# Altium PCB MAX96717_EVB_revC.PcbDoc (part 1 of 2)
Units mm, origin at the board's own origin, x right, y up, seen from the top; angles counter-clockwise.
Board outline 60 x 50 mm, 4 copper layers (Top Layer, Mid Layer 1, Mid Layer 2, Bottom Layer), stack 1.586 mm thick; 104 components, 57 nets, 332 pads, 116 vias.
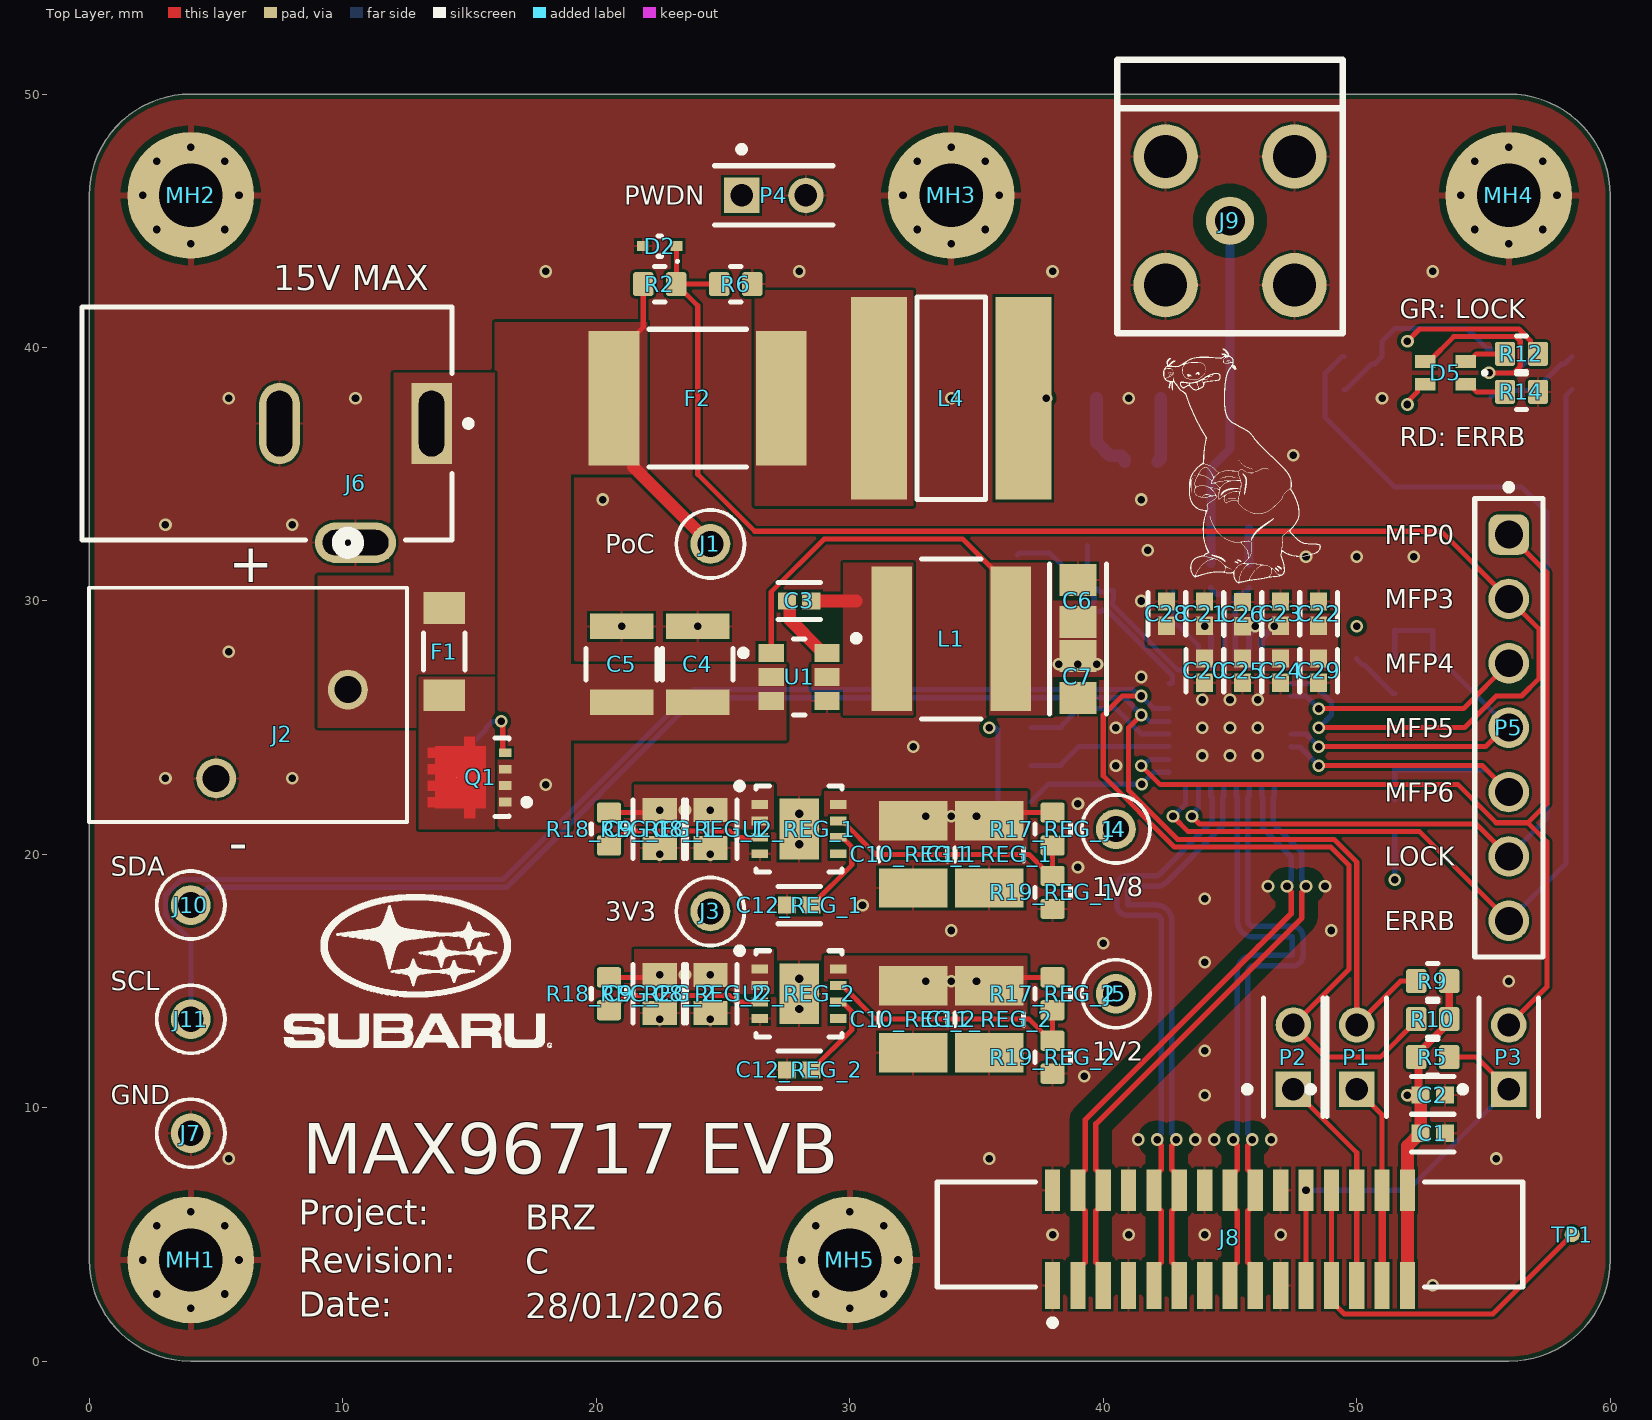
[diagram p0: Top Layer view]
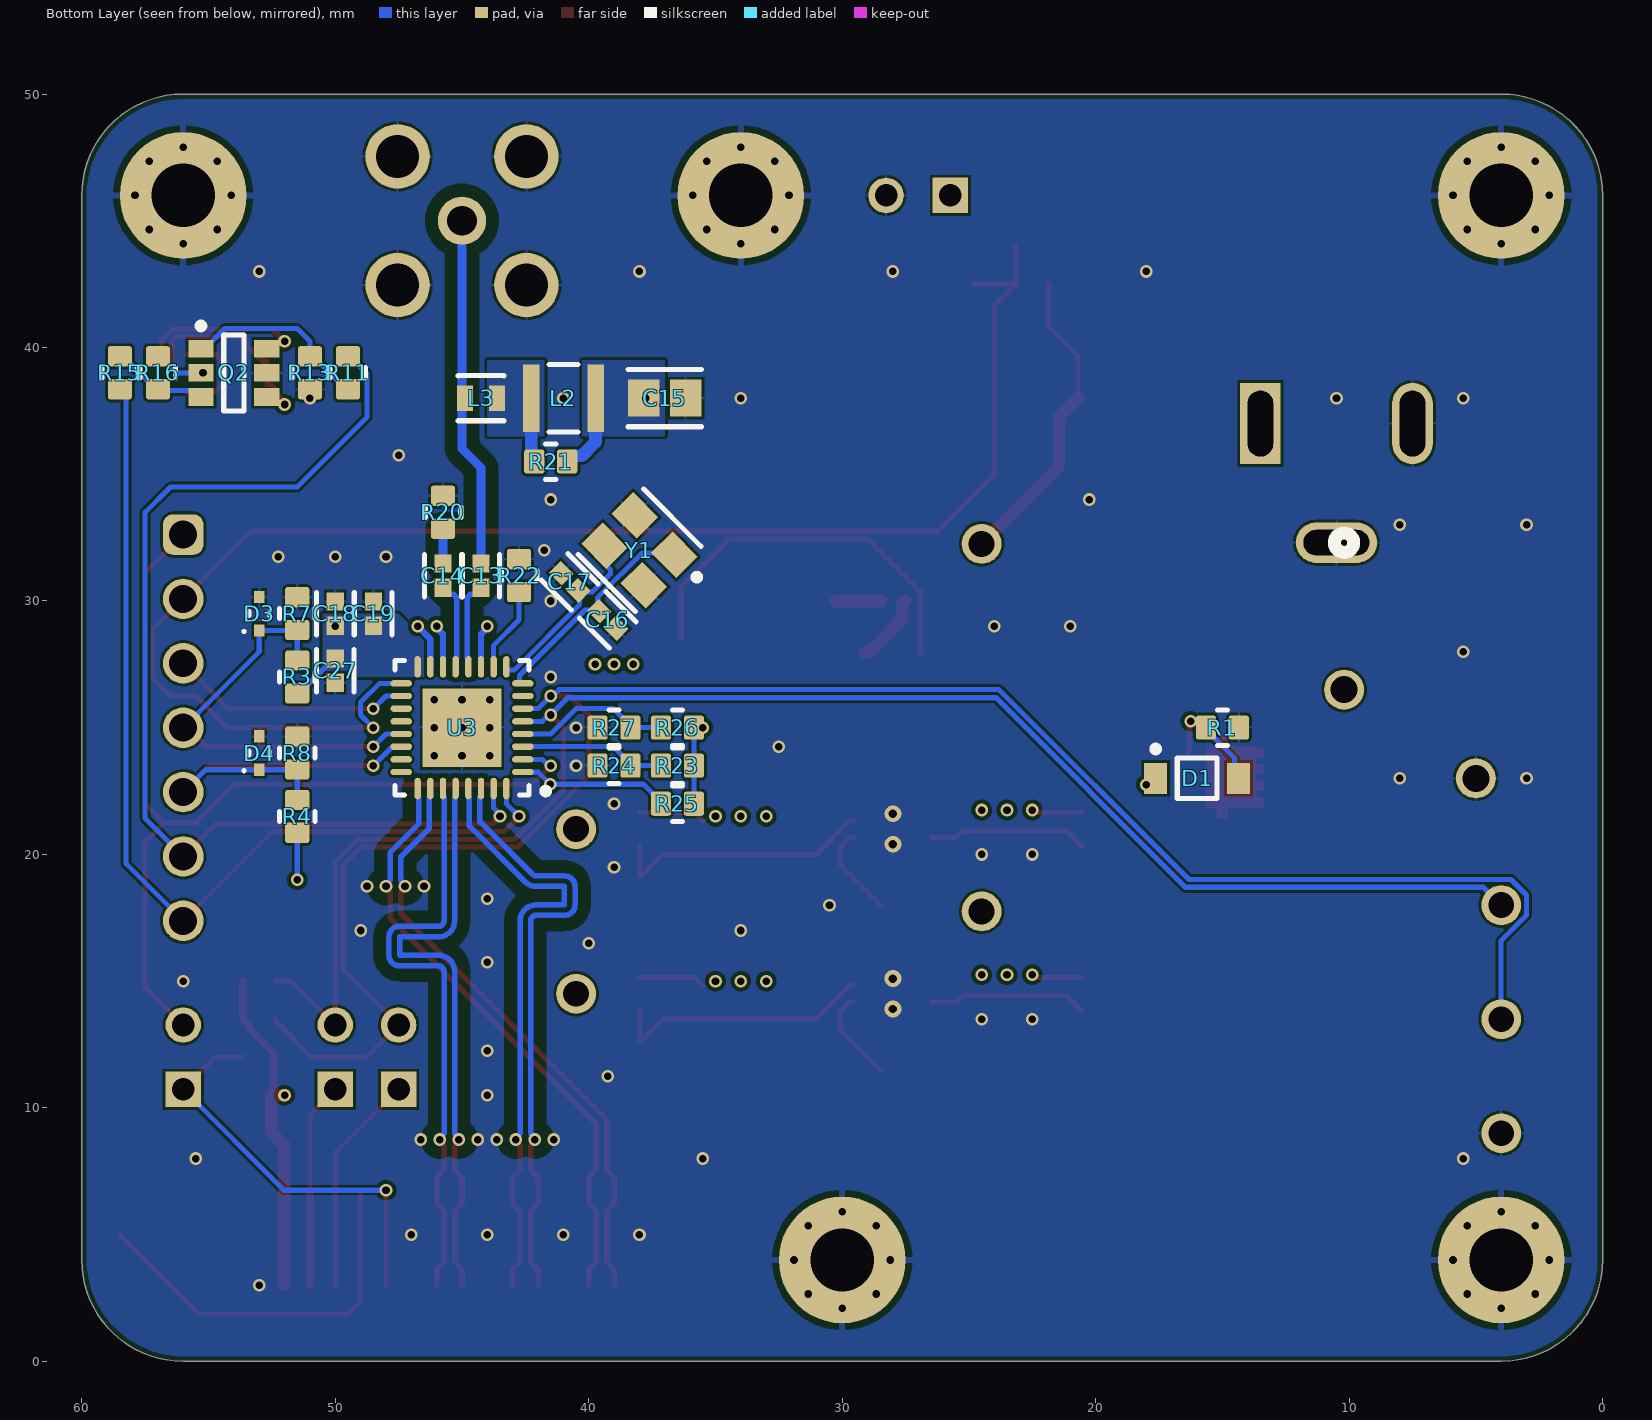
[diagram p1: Bottom Layer view, seen from below]
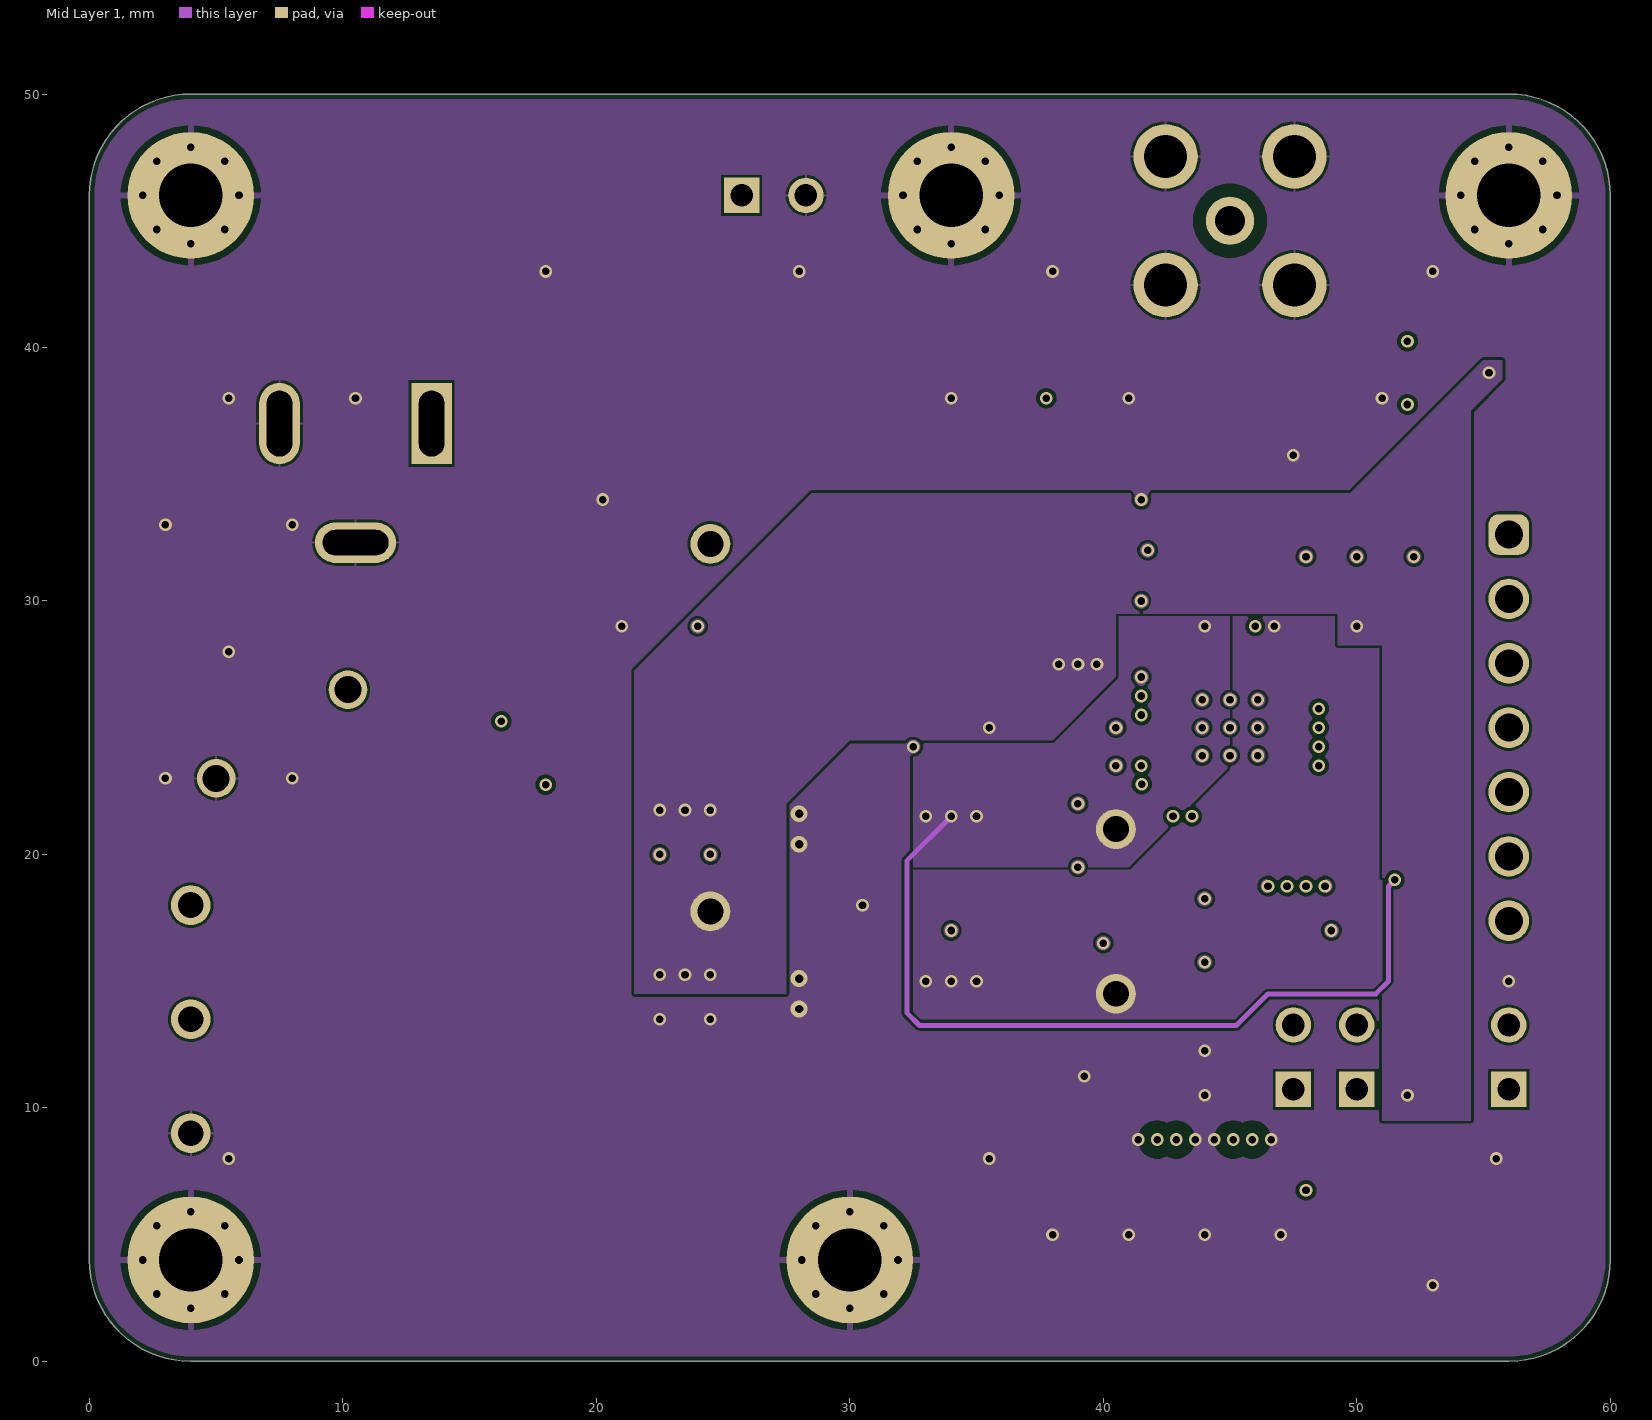
[diagram p2: Mid Layer 1]
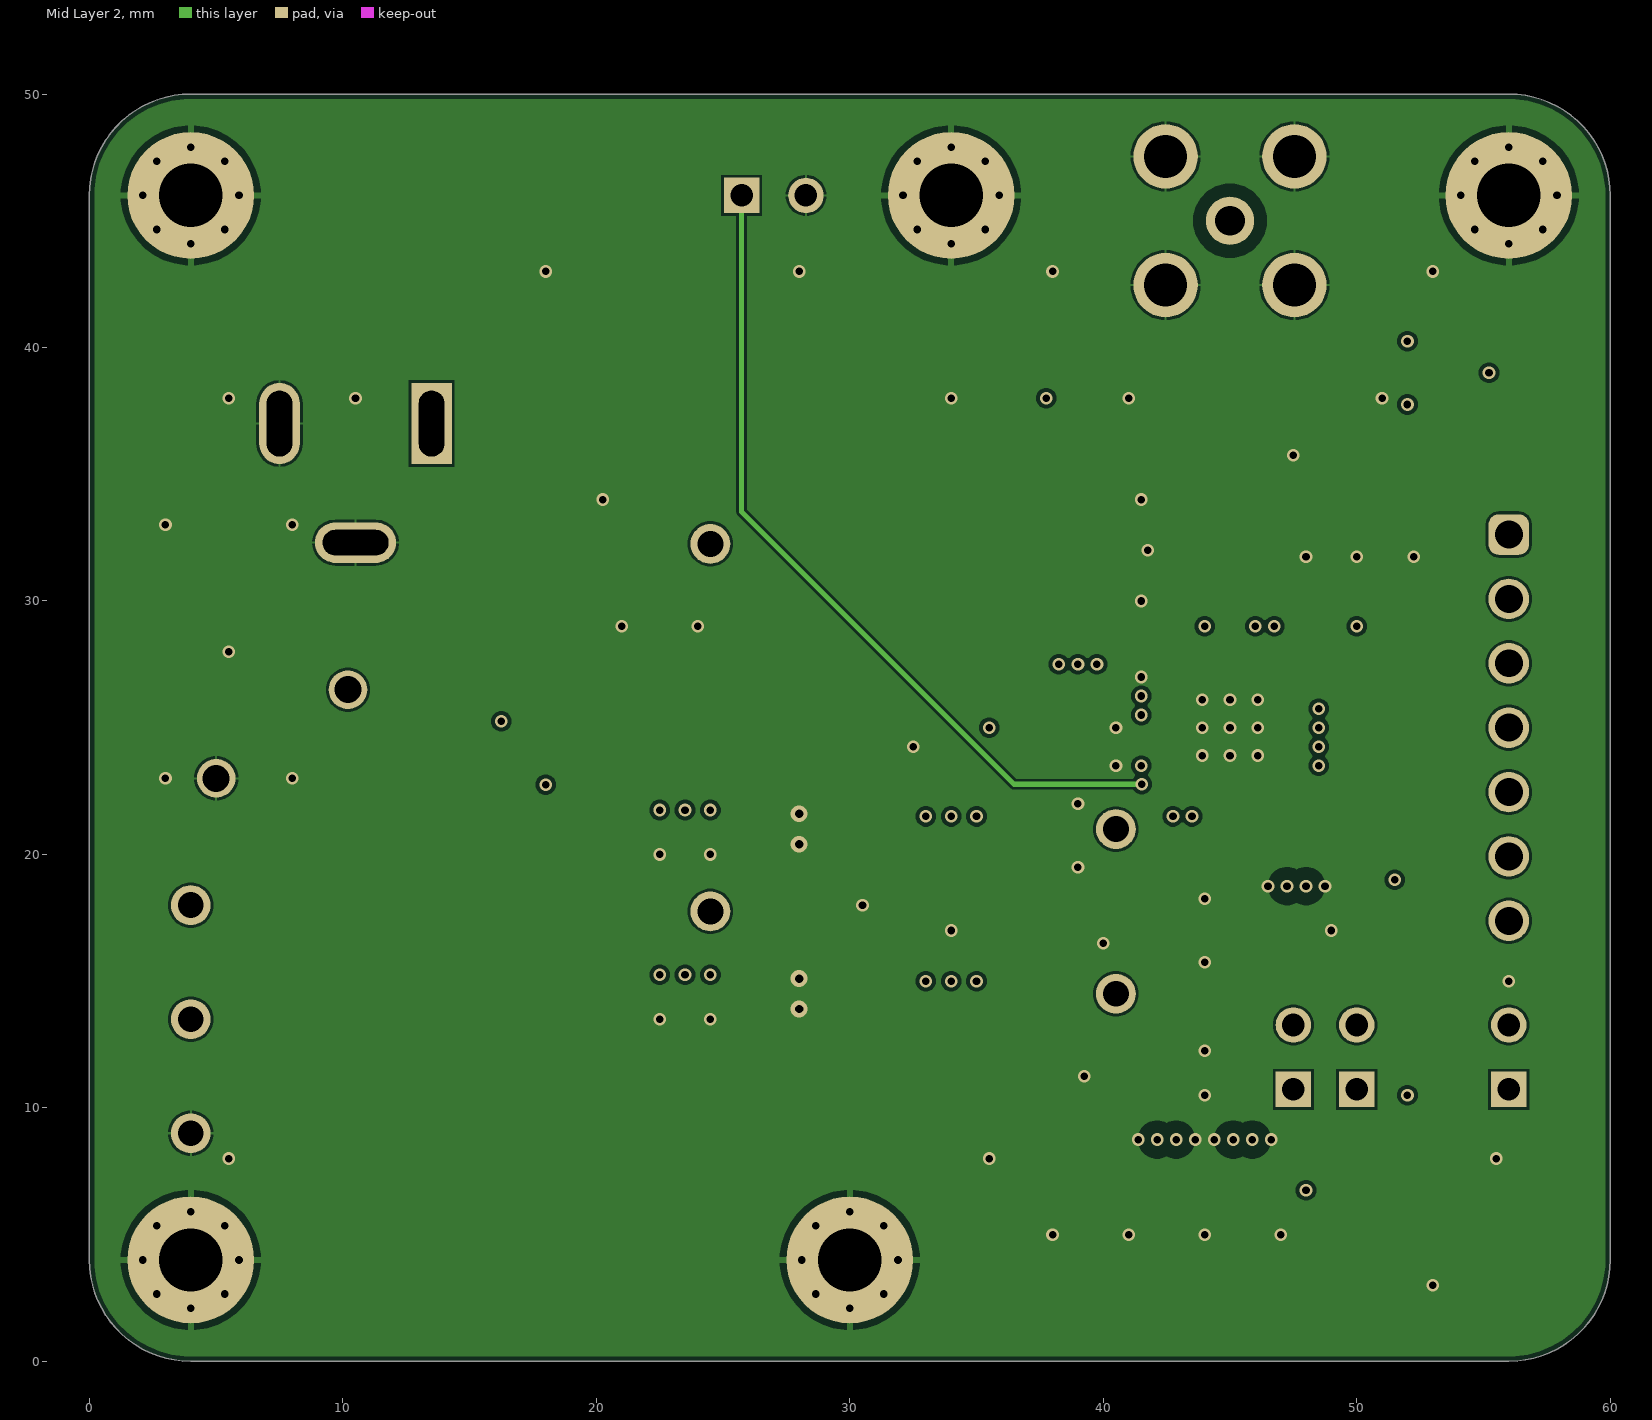
[diagram p3: Mid Layer 2]
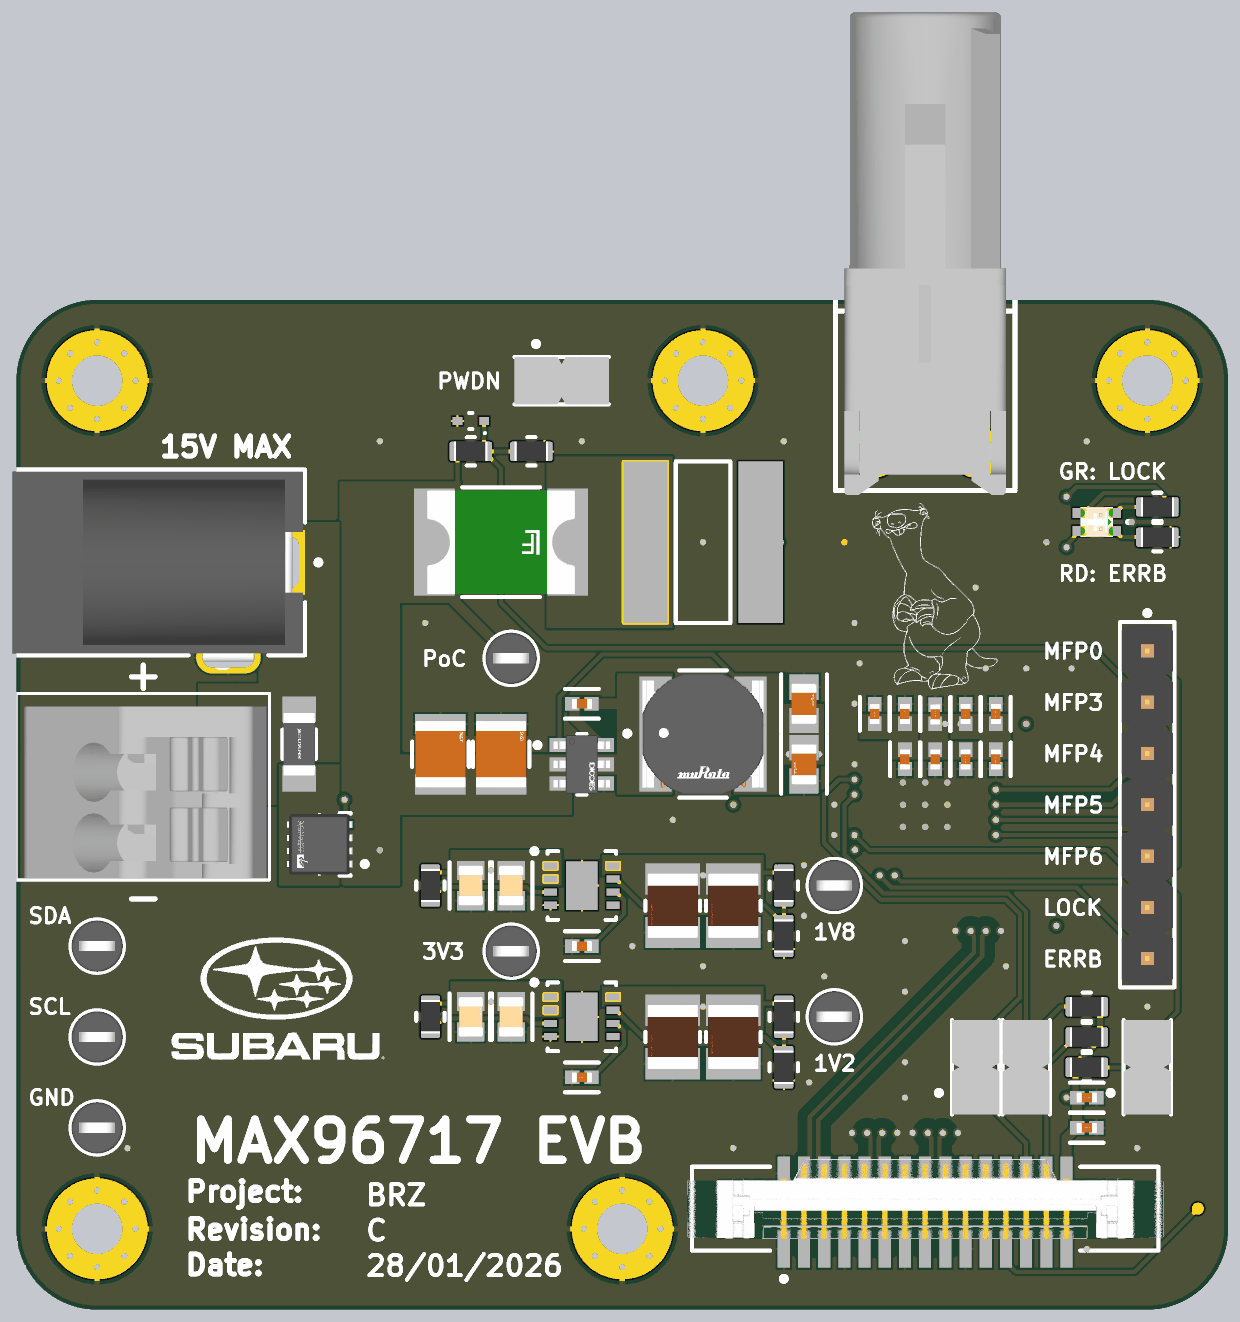
[diagram p4: 3D render of the assembled board from above, using the file's embedded part models]
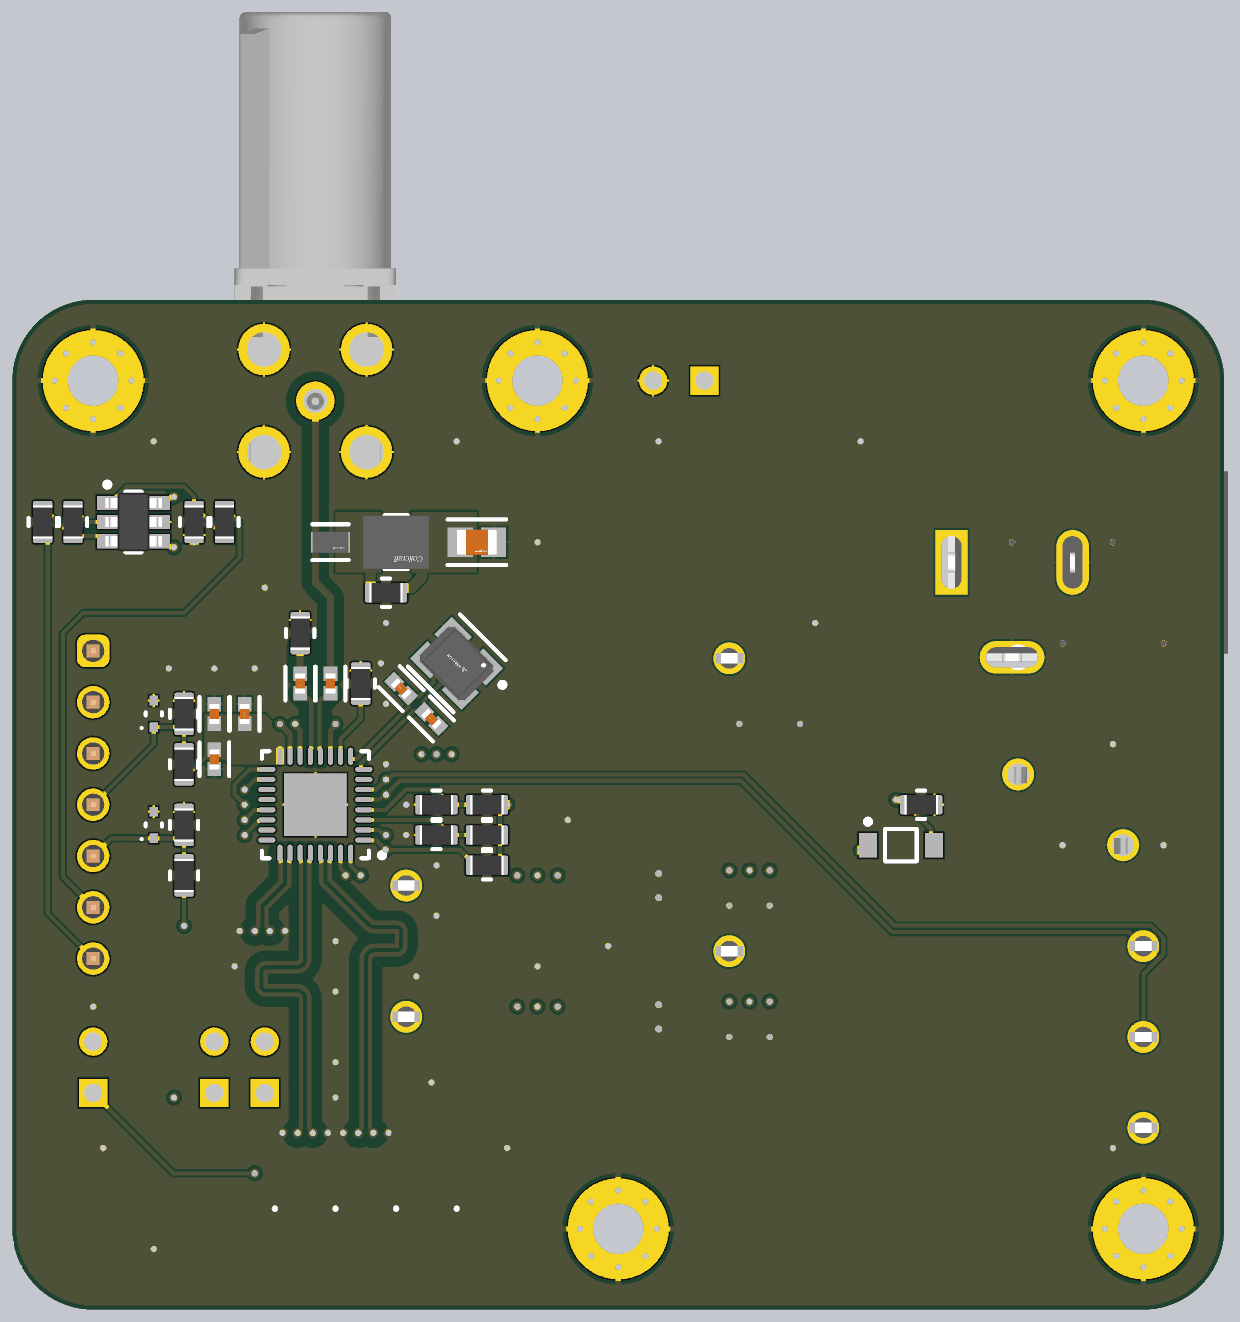
[diagram p5: 3D render of the assembled board from below, using the file's embedded part models]

## Layer stack, top to bottom
Top Solder: solder mask 0.0127, Solder Resist, Dk 3.8
Top Layer: signal copper 0.035
Dielectric 1: prepreg 0.2104, 7628, Dk 4.6
Mid Layer 1: signal copper 0.0152
Core: core 1.065, FR-4, Dk 4.5
Mid Layer 2: signal copper 0.0152
Dielectric 2: prepreg 0.2104, 7628, Dk 4.6
Bottom Layer: signal copper 0.035
Bottom Solder: solder mask 0.0127, Solder Resist, Dk 3.8

## Board outline
0,4 ccw(c4,4) 4,0 56,0 ccw(c56,4) 60,4 60,6 60,46 ccw(c56,46) 56,50 4,50 ccw(c4,46) 0,46

## Design rules (kind name [scope] priority, off if disabled: settings)
BoardOutlineClearance [All] p1: gap=0.2 ignorepadtopadclearanceinfootprint=FALSE
Clearance "IMPEDANCE CLEARANCE" [InNetClass('50SINGLE') or InDifferentialPairClass('100DIFF') or InDifferentialPairClass('CSI') vs InNet('GND')] p1: gap=0.102 ignorepadtopadclearanceinfootprint=FALSE except(0.5: Arc-Poly Track-Poly THPad-Poly Via-Poly Fill-Poly Poly-Poly)
Clearance [All] p2: gap=0.102 ignorepadtopadclearanceinfootprint=FALSE except(0.127: Arc-Via Track-Via SMDPad-Via THPad-Via Via-Via Via-Fill Via-Poly Via-Region Via-Text; 0.25: Arc-Hole Track-Hole SMDPad-Hole THPad-Hole Via-Hole Fill-Hole Poly-Hole Region-Hole Text-Hole)
ComponentClearance [All] p1: gap=0.102 collisioncheckmode=3 verticalgap=0.102 showdistances=TRUE
DiffPairsRouting 100OHM [InDifferentialPairClass('100DIFF') or InDifferentialPairClass('CSI')] p1: maxlimit=0.2 minlimit=0.127 mostfreqgap=0.2 toplayer_mingap=0.2 toplayer_minwidth=0.217 toplayer_maxwidth=0.217 toplayer_prefwidth=0.217 midlayer1_maxgap=0.127 midlayer1_prefgap=0.127 midlayer1_minwidth=0.09 midlayer1_maxwidth=0.09 midlayer1_prefwidth=0.09 midlayer2_maxgap=0.127 midlayer2_prefgap=0.127 midlayer2_minwidth=0.09 midlayer2_maxwidth=0.09 midlayer2_prefwidth=0.09 bottomlayer_mingap=0.2 bottomlayer_minwidth=0.217 bottomlayer_maxwidth=0.217 bottomlayer_prefwidth=0.217 impedanceprofiledriven=TRUE impedanceprofileid={CC6442F0-45BD-4488-A742-C23EBCDFA98F} impedanceprofilevalue=100.000000 maxuncoupledlength=12.7
DiffPairsRouting [All] p2: maxlimit=0.102 minlimit=0.102 mostfreqgap=0.102 toplayer_minwidth=0.102 toplayer_maxwidth=1816.048 toplayer_prefwidth=0.2 midlayer1_minwidth=0.102 midlayer1_maxwidth=1816.048 midlayer1_prefwidth=0.2 midlayer2_minwidth=0.102 midlayer2_maxwidth=1816.048 midlayer2_prefwidth=0.2 bottomlayer_minwidth=0.102 bottomlayer_maxwidth=1816.048 bottomlayer_prefwidth=0.2 maxuncoupledlength=12.7
Height [All] p1: minheight=0 maxheight=1816.048 prefheight=12.7
HoleSize [All] p1: absolutevalues=TRUE maxlimit=6.3 minlimit=0.2 maxpercent=80.000 minpercent=20.000
HoleToHoleClearance [All] p1: gap=0.25 allowstackedmicrovias=FALSE
MatchedLengths CSI_INTRA_PAIR [InDifferentialPairClass('CSI')] p1: tolerance=0.1 checknetsindiffpair=TRUE checkdiffpairvsdiffpair=FALSE checkxsignals=FALSE checkothers=FALSE
MatchedLengths CSI_INTER_PAIR [InDifferentialPairClass('CSI')] p2: tolerance=0.1 checknetsindiffpair=FALSE checkdiffpairvsdiffpair=TRUE checkxsignals=TRUE checkothers=TRUE
MinimumAnnularRing [All] p1: minimumring=0.076
MinimumSolderMaskSliver [All] p1: minsoldermaskwidth=0
PlaneClearance [All] p1: clearance=0.102
PlaneConnect PlaneConnectPowerPads [InPadClass('PowerPads')] p1: planeconnectstyle=Direct reliefexpansion=0.508 reliefentries=4 reliefconductorwidth=0.254 reliefairgap=0.254
PlaneConnect [All] p2: pad.planeconnectstyle=Relief pad.reliefexpansion=0.3 pad.reliefentries=4 pad.reliefconductorwidth=0.102 pad.reliefairgap=0.102 via.planeconnectstyle=Direct via.reliefexpansion=0.3 via.reliefentries=4 via.reliefconductorwidth=0.127 via.reliefairgap=0.127
PolygonConnect PolygonConnectPowerPads [All vs InNetClass('PWR')] p1: connectstyle=Direct reliefconductorwidth=0.254 reliefentries=4 polygonreliefangle="90 Angle" airgapwidth=0.254
PolygonConnect [All] p2: thpad.connectstyle=Relief thpad.reliefconductorwidth=0.102 thpad.reliefentries=4 thpad.polygonreliefangle="90 Angle" thpad.airgapwidth=0.102 smdpad.connectstyle=Relief smdpad.reliefconductorwidth=0.102 smdpad.reliefentries=4 smdpad.polygonreliefangle="90 Angle" smdpad.airgapwidth=0.102 via.connectstyle=Direct via.reliefconductorwidth=0.127 via.reliefentries=4 via.polygonreliefangle="90 Angle" via.airgapwidth=0.127
RoutingVias [All] p1: holewidth=0.2 width=0.45 viastyle="Through Hole" minholewidth=0.2 minwidth=0.45 maxholewidth=6.3 maxwidth=6.55
SilkToSilkClearance [All] p1: silktosilkclearance=0
SilkToSolderMaskClearance [IsPad] p1: minsilkscreentomaskgap=0.102 clearancetoexposedcopper=TRUE
SolderMaskExpansion [All] p1: expansion=0.075 istentingtop=FALSE
SupplyNets "Schematic Supply Nets" [InNet('PoC_PWR')] p1: voltage=0.000
SupplyNets "Schematic Supply Nets_6" [InNet('1V8')] p2: voltage=0.000
SupplyNets "Schematic Supply Nets_5" [InNet('3V3')] p3: voltage=0.000
SupplyNets "Schematic Supply Nets_2" [InNet('1V2')] p4: voltage=0.000
SupplyNets "Schematic Supply Nets_1" [InNet('GND')] p5: voltage=0.000
Width Width_50OHM [InNetClass('50SINGLE')] p1: maxlimit=0.342 minlimit=0.177 preferedwidth=0.342 toplayer_minwidth=0.342 midlayer1_maxwidth=0.177 midlayer1_prefwidth=0.177 midlayer2_maxwidth=0.177 midlayer2_prefwidth=0.177 bottomlayer_minwidth=0.342 impedanceprofiledriven=TRUE impedanceprofileid={A0E98ED3-79DA-425E-A268-866B2A4DC5A1} impedanceprofilevalue=50.000000 minimp=50.000000 maximp=50.000000 favimp=50.000000
Width [All] p2: maxlimit=1816.048 minlimit=0.102 preferedwidth=0.2
20 further rules are at their usual default settings.

## Classes and differential pairs
differential pair class CSI: CSI_CK CSI_D0 CSI_D1
differential pair class 100DIFF: SIO
channel class ADJ_REG: REG_1 REG_2
net class PWR: 1V2 1V8 3V3 NetC3_2 NetC15_1 NetC24_1 NetF1_1 NetF1_2 NetF2_1 NetL2_2 PoC_PWR
net class 50SINGLE: NetC14_2 RF_OUT
component class REG_2: C8_REG_2 C9_REG_2 C10_REG_2 C11_REG_2 C12_REG_2 R17_REG_2 R18_REG_2 R19_REG_2 U2_REG_2
component class REG_1: C8_REG_1 C9_REG_1 C10_REG_1 C11_REG_1 C12_REG_1 R17_REG_1 R18_REG_1 R19_REG_1 U2_REG_1
component class MAX96717_EVB_revC: C1 C2 D1 D2 D3 D4 D5 F1 F2 J1 J2 J3 J4 J5 J6 J7 J8 J9 J10 J11 MH1 MH2 MH3 MH4 MH5 P1 P2 P3 P4 P5 Q1 Q2 R1 R2 R3 R4 R5 R6 R7 R8 R9 R10 R11 R12 R13 R14 R15 R16 TP1
component class GMSL_SERIALIZER: C13 C14 C15 C16 C17 C18 C19 C20 C21 C22 C23 C24 C25 C26 C27 C28 C29 L2 L3 L4 R20 R21 R22 R23 R24 R25 R26 R27 U3 Y1
component class 3V3_REG: C3 C4 C5 C6 C7 L1 U1
differential pair X25: +X25_P -X25_N
differential pair SIO: +SIO_P -SIO_N
differential pair CSI_D1: +CSI_D1_P -CSI_D1_N
differential pair CSI_D0: +CSI_D0_P -CSI_D0_N
differential pair CSI_CK: +CSI_CK_P -CSI_CK_N

## Components (designator, comment, footprint, x,y, rotation, side; value= is the part's Value field where it differs from the comment)
C1 "100n" FP-0402-L_1_0_0_05-W_0_5-IPC_A 53,9 r0 top
C2 "10u" FP-0402-L_1_0_0_05-W_0_5-IPC_A 53,10.5 r0 top
C3 "100n" FP-0402-L_1_0_0_05-W_0_5-IPC_A 28,30 r0 top
C4 "12103D106KAT2A" FP-1210-L_3_3_0_4-W_2_5_0-MFG 24,27.5 r90 top
C5 "DNP" FP-1210-L_3_3_0_4-W_2_5_0-MFG 21,27.5 r90 top
C6 "GRM21BR61E226ME44L" FP-GRM21B-0_2-e0_2_0_7-IPC_B 39,30 r90 top
C7 "GRM21BR61E226ME44L" FP-GRM21B-0_2-e0_2_0_7-IPC_B 39,27 r270 top
C8_REG_1 "C0805C475J4RACAUTO" FP-C0805C475J4RACAUTO-MFG 24.5,21 r270 top (schematic designator C8)
C8_REG_2 "C0805C475J4RACAUTO" FP-C0805C475J4RACAUTO-MFG 24.5,14.5 r270 top (schematic designator C8)
C9_REG_1 "DNP" FP-C0805C475J4RACAUTO-MFG 22.5,21 r270 top (schematic designator C9)
C9_REG_2 "DNP" FP-C0805C475J4RACAUTO-MFG 22.5,14.5 r270 top (schematic designator C9)
C10_REG_1 "HMK325B7105KN-T" FP-1210-L_3_2_0_3-W_2_5_0-IPC_B 32.5,20 r270 top (schematic designator C10)
C10_REG_2 "HMK325B7105KN-T" FP-1210-L_3_2_0_3-W_2_5_0-IPC_B 32.5,13.5 r270 top (schematic designator C10)
C11_REG_1 "DNP" FP-1210-L_3_2_0_3-W_2_5_0-IPC_B 35.5,20 r270 top (schematic designator C11)
C11_REG_2 "DNP" FP-1210-L_3_2_0_3-W_2_5_0-IPC_B 35.5,13.5 r270 top (schematic designator C11)
C12_REG_1 "DNP" FP-0402-L_1_0_0_05-W_0_5-IPC_A 28,18 r180 top (schematic designator C12)
C12_REG_2 "DNP" FP-0402-L_1_0_0_05-W_0_5-IPC_A 28,11.5 r180 top (schematic designator C12)
C13 "100n" FP-0402-L_1_0_0_05-W_0_5-IPC_A 44.25,31 r90 bottom
C14 "100n" FP-0402-L_1_0_0_05-W_0_5-IPC_A 45.75,31 r90 bottom
C15 "GRM21BR61E226ME44L" FP-GRM21B-0_2-e0_2_0_7-IPC_B 37,38 r180 bottom
C16 "30p" FP-0402-L_1_0_0_05-W_0_5-IPC_A 39.25,29.25 r225 bottom
C17 "30p" FP-0402-L_1_0_0_05-W_0_5-IPC_A 40.75,30.75 r45 bottom
C18 "100n" FP-0402-L_1_0_0_05-W_0_5-IPC_A 50,29.5 r90 bottom
C19 "10n" FP-0402-L_1_0_0_05-W_0_5-IPC_A 48.5,29.5 r90 bottom
C20 "100n" FP-0402-L_1_0_0_05-W_0_5-IPC_A 44,27.25 r270 top
C21 "10n" FP-0402-L_1_0_0_05-W_0_5-IPC_A 44,29.5 r90 top
C22 "100n" FP-0402-L_1_0_0_05-W_0_5-IPC_A 48.5,29.5 r90 top
C23 "10n" FP-0402-L_1_0_0_05-W_0_5-IPC_A 47,29.5 r90 top
C24 "10u" FP-0402-L_1_0_0_05-W_0_5-IPC_A 47,27.25 r270 top
C25 "100n" FP-0402-L_1_0_0_05-W_0_5-IPC_A 45.5,27.25 r270 top
C26 "10n" FP-0402-L_1_0_0_05-W_0_5-IPC_A 45.5,29.479 r90 top
C27 "10u" FP-0402-L_1_0_0_05-W_0_5-IPC_A 50,27.25 r270 bottom
C28 "10u" FP-0402-L_1_0_0_05-W_0_5-IPC_A 42.5,29.5 r90 top
C29 "10u" FP-0402-L_1_0_0_05-W_0_5-IPC_A 48.5,27.25 r270 top
D1 "MMSZ5242BT1G" ONSC-SOD-123-2-425-04_V 16,23 r180 bottom
D2 "MM5Z3V3T1G" ONSC-SOD-523-2-502-01_V 22.5,44 r180 top
D3 "DNP/MM5Z3V3T1G" ONSC-SOD-523-2-502-01_V 53,29.5 r90 bottom
D4 "DNP/MM5Z3V3T1G" ONSC-SOD-523-2-502-01_V 53,24 r90 bottom
D5 "150066RG54050" WL-SBCD_0606 53.5,39 r270 top
F1 "1A" FP-SF-1206FP-MFG 14,28 r270 top
F2 "2920L050DR" FP-2920L050DR-MFG 24,38 r180 top
J1 "5001" FP-5001-MFG 24.5,32.25 r0 top
J2 "1-2834011-2" 1-2834011-2-Footprint-1 10.2,26.5 r270 top
J3 "5001" FP-5001-MFG 24.5,17.75 r0 top
J4 "5001" FP-5001-MFG 40.5,21 r0 top
J5 "5001" FP-5001-MFG 40.5,14.5 r0 top
J6 "PJ-102A" FP-PJ-102A-MFG 7,37 r90 top
J7 "5001" FP-5001-MFG 4,9 r0 top
J8 "1-1734248-5" FP-1-1734248-5-MFG 45,5 r180 top
J9 "FA1-NDRP-PCB-8" FA1-NDRP-PCB-8-Footprint-1 45,45 r0 top
J10 "5001" FP-5001-MFG 4,18 r0 top
J11 "5001" FP-5001-MFG 4,13.5 r0 top
L1 "1255AY-3R9N=P3" FP-DG6045C-MFG 34,28.5 r0 top
L2 "ADL32VHC-220M" FP-1210POC-MFG 41,38 r0 bottom value=22uH
L3 "PFL1609-561MEW" FP-PFL1609-MFG 44.25,38 r0 bottom value=0.56uH
L4 "SRN8040-101M" BOUR-SRN8040-101M_V 34,38 r0 top
MH1 "PTHV6" "PTHV6 M2" 4,4 r90 top net-tie
MH2 "PTHV6" "PTHV6 M2" 4,46 r90 top net-tie
MH3 "PTHV6" "PTHV6 M2" 34,46 r90 top net-tie
MH4 "PTHV6" "PTHV6 M2" 56,46 r90 top net-tie
MH5 "PTHV6" "PTHV6 M2" 30,4 r90 top net-tie
P1 "5-146280-2" TECO-5-146280-2_V 50,12 r90 top
P2 "5-146280-2" TECO-5-146280-2_V 47.5,12 r90 top
P3 "5-146280-2" TECO-5-146280-2_V 56,12 r90 top
P4 "5-146280-2" TECO-5-146280-2_V 27,46 r0 top
P5 "61300711121" 61300711121 56,25 r270 top
Q1 "SISH615ADN-T1-GE3" SISH615ADN-T1-GE3-Footprint-1 15,23 r90 top
Q2 "FDC6327C" FAIR-SOT23-6_V 54,39 r180 bottom
R1 "100k" R0603B 15,25 r0 bottom
R2 "100k" R0603B 22.5,42.5 r180 top
R3 "10k" R0603B 51.5,27 r270 bottom value=100k
R4 "100k" R0603B 51.5,21.5 r270 bottom
R5 "100k" R0603B 53,12 r180 top
R6 "10k" R0603B 25.5,42.5 r180 top value=100k
R7 "100k" R0603B 51.5,29.5 r270 bottom
R8 "DNP" R0603B 51.5,24 r270 bottom value=100k
R9 "2.7k" R0603B 53,15 r0 top value=100k
R10 "2.7k" R0603B 53,13.5 r0 top value=100k
R11 "1k" R0603B 49.5,39 r90 bottom
R12 "1k" R0603B 56.5,39.75 r180 top
R13 "100k" R0603B 51,39 r270 bottom
R14 "1k" R0603B 56.5,38.25 r180 top
R15 "1k" R0603B 58.5,39 r90 bottom
R16 "100k" R0603B 57,39 r270 bottom
R17_REG_1 "VARIES" R0603B 38,21 r90 top (schematic designator R17)
R17_REG_2 "VARIES" R0603B 38,14.5 r90 top (schematic designator R17)
R18_REG_1 "100k" R0603B 20.5,21 r270 top (schematic designator R18)
R18_REG_2 "100k" R0603B 20.5,14.5 r270 top (schematic designator R18)
R19_REG_1 "100k" R0603B 38,18.5 r90 top (schematic designator R19)
R19_REG_2 "100k" R0603B 38,12 r90 top (schematic designator R19)
R20 "49.9" R0603B 45.75,33.5 r270 bottom value=100k
R21 "5.1k" R0603B 41.5,35.5 r180 bottom value=100k
R22 "402" R0603B 42.75,31 r270 bottom value=100k
R23 "68.1k" R0603B 36.5,23.5 r180 bottom value=100k
R24 "32.4k" R0603B 39,23.5 r180 bottom value=100k
R25 "100k" R0603B 36.5,22 r180 bottom
R26 "44.2k" R0603B 36.5,25 r180 bottom value=100k
R27 "56.2k" R0603B 39,25 r180 bottom value=100k
TP1 "TPAD6R" "New footprint 1" 58.5,5 r90 top
U1 "AP63203WU-7" FP-TSOT26-MFG 28,27 r0 top
U2_REG_1 "MCP1726T-ADJE/MF" DFN-MF8 28,21 r0 top (schematic designator U2)
U2_REG_2 "MCP1726T-ADJE/MF" DFN-MF8 28,14.5 r0 top (schematic designator U2)
U3 "MAX96717FGTJ/VY+T" QFN50P500X500X80_HS-33N 45,25 r0 bottom
Y1 "ABM8G-25.000MHZ-18-D2Y-T" FP-ABM8G-MFG 38,32 r45 bottom

## Footprints (in the part's own frame and the unit in brackets; to place one, negate y for a bottom-side part, rotate by r counter-clockwise, add the part's x,y. Pads: shape width x height; smd on the part's side, far side on the other; paste and mask are expansions set on the pad)
1-2834011-2-Footprint-1 [mil]
  round 62 / inner round 60 / far side round 62 hole 42 paste-99999 mask+0: 1(0,0) 2(137.8,-204.72)
  silkscreen extent -243,-402 206,92, body extent -132,-386 202,86, height 499
61300711121 [mm] "Pin Header, pitch 2.54 mm, THT, Vertical, single row, 7p"
  rrect50% 1.6x1.6 hole 1.1: 1(-7.62,0)
  round 1.6 hole 1.1: 2(-5.08,0) 3(-2.54,0) 4(0,0) 5(2.54,0) 6(5.08,0) 7(7.62,0)
  silkscreen extent -9.61,-1.35 9.04,1.35, body extent -8.89,-1.27 8.89,1.27, height 8.57
BOUR-SRN8040-101M_V [mm] "SMD, 2-Leads, Body 8x8mm"
  rect 2.2x8 smd: 1(-2.85,0) 2(2.85,0)
  silkscreen extent -1.35,-4 1.35,4, body extent -4,-4 4,4, height 4
DFN-MF8 [mm] "SON, 8-Leads, Body 3x3mm, Pitch 0.65mm, Microchip Recommended"
  rect 0.65x0.35 smd: 1(-1.55,0.975) 2(-1.55,0.325) 3(-1.55,-0.325) 4(-1.55,-0.975) 5(1.55,-0.975) 6(1.55,-0.325) 7(1.55,0.325) 8(1.55,0.975)
  rect 1.55x2.4 smd: 9(0,0)
  silkscreen extent -2.47,-1.7 1.7,1.82, body extent -1.55,-1.55 1.55,1.55, height 1
FA1-NDRP-PCB-8-Footprint-1 [mil]
  round 75 hole 46: 1(0,0)
  round 100 hole 67: 2(-100,-100) 2(-100,100) 2(100,-100) 2(100,100)
  silkscreen extent -175,-175 175,250, body extent -157,-183 157,758, height 421
FAIR-SOT23-6_V [mm] "SOT23, 6-Leads, Body 2.9x1.6mm, Pitch 0.95mm"
  rect 1x0.7 smd: 1(-1.3,0.95) 2(-1.3,0) 3(-1.3,-0.95) 4(1.3,-0.95) 5(1.3,0) 6(1.3,0.95)
  silkscreen extent -1.43,-1.5 0.4,1.97, body extent -1.4,-1.45 1.4,1.45, height 1.45
FP-1-1734248-5-MFG [mm]
  rect 0.6x1.65 smd paste+0 mask+0: 1(7,-1.75) 2(6,-1.75) 3(5,-1.75) 4(4,-1.75) 5(3,-1.75) 6(2,-1.75) 7(1,-1.75) 8(0,-1.75) 9(-1,-1.75) 10(-2,-1.75) 11(-3,-1.75) 12(-4,-1.75) 13(-5,-1.75) 14(-6,-1.75) 15(-7,-1.75)
  rect 0.6x1.85 smd paste+0 mask+0: 1(7,2) 2(6,2) 3(5,2) 4(4,2) 5(3,2) 6(2,2) 7(1,2) 8(0,2) 9(-1,2) 10(-2,2) 11(-3,2) 12(-4,2) 13(-5,2) 14(-6,2) 15(-7,2)
  silkscreen extent -11.55,-2.07 11.55,3.6, body extent -11.65,-2.67 11.65,3.02, height 0.25
FP-0402-L_1_0_0_05-W_0_5-IPC_A [mm]
  rect 0.715x0.672 smd paste+0 mask+0: 1(-0.479,0) 2(0.479,0)
  silkscreen extent -0.84,-0.74 0.84,0.74, body extent -1.04,-0.54 1.04,0.54, height 0.25
FP-1210-L_3_2_0_3-W_2_5_0-IPC_B [mm]
  rect 1.553x2.706 smd paste+0 mask+0: 1(-1.325,0) 2(1.325,0)
  silkscreen extent -0.25,-1.35 0.25,1.35, body extent -2.35,-1.6 2.35,1.6, height 0.25
FP-1210-L_3_3_0_4-W_2_5_0-MFG [mm]
  rect 1x2.5 smd paste+0 mask+0: 1(-1.5,0) 2(1.5,0)
  silkscreen extent -0.62,-1.4 0.62,1.4, body extent -2.1,-1.5 2.1,1.5, height 0.25
FP-1210POC-MFG [mm]
  rect 0.65x2.65 smd paste+0 mask+0: 1(-1.27,0) 2(1.27,0)
  silkscreen extent -0.57,-1.34 0.57,1.34, body extent -1.65,-1.34 1.65,1.34, height 3
FP-2920L050DR-MFG [mm]
  rect 2x5.3 smd paste+0 mask+0: 1(-3.3,0) 2(3.3,0)
  silkscreen extent -1.92,-2.72 1.92,2.72, body extent -4.4,-2.82 4.4,2.82, height 0.25
FP-5001-MFG [mm]
  round 1.57 hole 1.016 paste-2539.97 mask+0: 1(0,0)
  silkscreen extent -1.35,-1.34 1.35,1.34, body extent -1.45,-1.45 1.45,1.45, height 0.25
FP-ABM8G-MFG [mm]
  rect 1.4x1.2 smd paste+0 mask+0: 1(-1.1,-0.85) 2(1.1,-0.85) 3(1.1,0.85) 4(-1.1,0.85)
  silkscreen extent -2.47,-1.82 1.6,1.82, body extent -1.6,-1.25 1.6,1.25, height 1
FP-C0805C475J4RACAUTO-MFG [mm]
  rect 0.95x1.35 smd paste+0 mask+0: 1(-0.75,0) 2(0.75,0)
  silkscreen extent -1.15,-1.05 1.15,1.05, body extent -1.4,-0.85 1.4,0.85, height 0.25
FP-DG6045C-MFG [mm]
  rect 1.6x5.7 smd paste+0 mask+0: 1(-2.35,0) 2(2.35,0)
  silkscreen extent -3.87,-3.15 1.17,3.15, body extent -3.25,-3.25 3.25,3.25, height 0.25
FP-GRM21B-0_2-e0_2_0_7-IPC_B [mm]
  rect 1.255x1.456 smd paste+0 mask+0: 1(-0.826,0) 2(0.826,0)
  silkscreen extent -1.45,-1.13 1.45,1.13, body extent -1.7,-0.98 1.7,0.98, height 0.25
FP-PFL1609-MFG [mm]
  rect 0.64x1.02 smd paste+0 mask+0: 1(-0.635,0) 2(0.635,0)
  silkscreen extent -0.9,-0.89 0.9,0.89, body extent -0.9,-0.54 0.9,0.54, height 0.95
FP-PJ-102A-MFG [mm]
  rect 3.2x1.6 hole 1 slot 2.6 at 0 deg paste-2539.97 mask+0: 1(0,-6.5)
  rrect100% 3.2x1.6 hole 1 slot 2.6 at 0 deg paste-2539.97 mask+0: 2(0,-0.5)
  rrect100% 1.6x3.2 hole 2.6 slot 1 at 0 deg paste-2539.97 mask+0: 3(-4.7,-3.5)
  silkscreen extent -4.6,-8.08 4.6,7.3, body extent -5.6,-7.4 4.7,7.4, height 0.25
FP-SF-1206FP-MFG [mm]
  rect 1.25x1.65 smd paste+0 mask+0: 1(-1.725,0) 2(1.725,0)
  silkscreen extent -0.72,-0.82 0.72,0.82, body extent -2.45,-0.92 2.45,0.92, height 0.25
FP-TSOT26-MFG [mm]
  rect 1x0.7 smd paste+0 mask+0: 1(-1.099,0.95) 2(-1.099,0) 3(-1.099,-0.95) 4(1.099,-0.95) 5(1.099,0) 6(1.099,0.95)
  silkscreen extent -2.32,-1.5 0.22,1.5, body extent -1.7,-1.6 1.7,1.6, height 0.25
"New footprint 1" [mm]
  round 0.6 smd paste-1: 1(0,0)
ONSC-SOD-123-2-425-04_V [mm] "SOD, 2-Leads, Body 2.69x1.6mm"
  rect 0.91x1.22 smd: 1(-1.635,0) 2(1.635,0)
  silkscreen extent -1.76,-0.8 0.78,1.28, body extent -1.35,-0.8 1.35,0.8, height 1.35
ONSC-SOD-523-2-502-01_V [mm] "SOD, 2-Leads, Body 1.2x0.8mm"
  rect 0.48x0.4 smd: 1(-0.66,0) 2(0.66,0)
  silkscreen extent -0.75,-0.4 0.07,0.65, body extent -0.6,-0.4 0.6,0.4, height 0.7
"PTHV6 M2" [mm]
  round 5 hole 2.5: 1(0,0)
  round 0.5 hole 0.3: 2(0,1.9) 3(1.344,1.344) 4(1.9,0) 5(1.344,-1.344) 6(0,-1.9) 7(-1.9,0) 7(-1.344,-1.344) 7(-1.344,1.344)
QFN50P500X500X80_HS-33N [mm] "QFN, 32-Leads, Body 5.00x5.00mm, Pitch 0.50mm, Thermal Pad 3.10x3.10mm, IPC Medium Density"
  oval 0.85x0.25 smd: 1(-2.4,1.75) 2(-2.4,1.25) 3(-2.4,0.75) 4(-2.4,0.25) 5(-2.4,-0.25) 6(-2.4,-0.75) 7(-2.4,-1.25) 8(-2.4,-1.75) 17(2.4,-1.75) 18(2.4,-1.25) 19(2.4,-0.75) 20(2.4,-0.25) 21(2.4,0.25) 22(2.4,0.75) 23(2.4,1.25) 24(2.4,1.75)
  oval 0.25x0.85 smd: 9(-1.75,-2.4) 10(-1.25,-2.4) 11(-0.75,-2.4) 12(-0.25,-2.4) 13(0.25,-2.4) 14(0.75,-2.4) 15(1.25,-2.4) 16(1.75,-2.4) 25(1.75,2.4) 26(1.25,2.4) 27(0.75,2.4) 28(0.25,2.4) 29(-0.25,2.4) 30(-0.75,2.4) 31(-1.25,2.4) 32(-1.75,2.4)
  rect 3.1x3.1 smd: 33(0,0)
  silkscreen extent -3.42,-2.65 2.65,2.65, body extent -2.5,-2.5 2.5,2.5, height 0.8
R0603B [mm] "Chip Resistor, 0603, 2-Leads, Body 1.58x0.85mm, IPC Medium Density"
  rrect25% 0.8x0.95 smd: 1(-0.65,0) 2(0.65,0)
  silkscreen extent -0.2,-0.7 0.2,0.7, body extent -0.82,-0.48 0.82,0.48, height 0.5
SISH615ADN-T1-GE3-Footprint-1 [mm]
  rect 0.35x0.5 smd paste+0 mask+0: 1(-0.937,-1.4) 2(-0.288,-1.4) 3(0.363,-1.4) 4(1.012,-1.4)
  round 0.025 smd mask+0: 5-6-7-8(0.038,0.51)
  Top Layer region: -1.187,-0.63 -1.187,-0.215 -1.568,-0.215 -1.568,0.215 -1.187,0.215 -1.187,1.35 -1.137,1.35 -1.137,1.65 -0.737,1.65 -0.737,1.35 -0.487,1.35 -0.487,1.65 -0.088,1.65 -0.088,1.35 0.163,1.35 0.163,1.65 0.563,1.65 0.563,1.35 0.813,1.35 0.813,1.65 1.212,1.65 1.212,1.35 1.262,1.35 1.262,0.215 1.643,0.215 1.643,-0.215 1.262,-0.215 1.262,-0.63
  silkscreen extent -1.51,-2.38 1.59,-1.01, body extent -1.67,-1.75 1.74,1.75, height 0.25
TECO-5-146280-2_V [mm] "Connector, 2-Leads, Body 4.67x2.34mm, Pitch 2.54mm"
  rect 1.4x1.4 hole 0.89: 1(-1.27,0)
  round 1.4 hole 0.89: 2(1.27,0)
  silkscreen extent -2.33,-1.17 2.33,1.94, body extent -2.34,-1.17 2.34,1.17, height 5.33
WL-SBCD_0606 [mm] "SMT Bi-color Chip LED Diffuesed, body 1.5x1.6mm"
  rect 0.5x0.8 smd: 1(-0.45,0.8) 2(-0.45,-0.8) 3(0.45,-0.8) 4(0.45,0.8)
  silkscreen extent -0.07,1.48 0.07,1.63, body extent -0.75,-0.8 0.75,0.8, height 0.55

## Part data
C1 C2 C3 C12_REG_1 C12_REG_2 C13 C14 C16 C17 C18 C19 C20 C21 C22 C23 C24 C25 C26 C27 C28 C29: library part CMP-001-00058-1, "LARGE PADS, 0402 CAP, CHANGE COMMENT TO MATCH REAL P/N", Capacitor Type=Ceramic, Case/Package=0402, Max Operating Temperature=85°C, Min Operating Temperature=-55°C, Mounting Technology="Surface Mount", Pins=2, RoHS Compliant=Yes
C4 C5: library part CMP-2000-05477-2, "General Purpose Ceramic Capacitor, 1210, 10uF, 10%, X5R, 15%, 25V", Capacitance=10uF, Case Code (Imperial)=1210, Case Code (Metric)=3225, Dielectric=X5R, Max Operating Temperature=85°C, Min Operating Temperature=-55°C, Package Quantity=1, Tolerance=10%, Voltage=25V, Case/Package=1210, Construction=Flat, Contact Plating=Tin, Depth=2.5mm, Height=2.29mm, Lead Free="Lead Free", Length=3.2mm, Mount="Surface Mount", Packaging="Tape and Reel", Radiation Hardening=No, REACH SVHC="No SVHC", RoHS Compliant=Yes, Series=-, Termination=SMD/SMT, Thickness=0.11inch, Voltage Rating=25V, Voltage Rating (DC)=25V, Width=0.098inch
C6 C7 C15: library part CMP-2007-03222-3, "Chip Multilayer Ceramic Capacitors for General Purpose, 0805, 22uF, X5R, 15%, 20%, 25V", Capacitance=22uF, Case Code (Imperial)=0805, Case Code (Metric)=2012, Dielectric=X5R, Max Operating Temperature=85°C, Min Operating Temperature=-55°C, Package Quantity=3000, Resistor Type=Ceramic, Tolerance=20%, Voltage=25V, Case/Package=0805, Depth=1.25mm, Height=1.25mm, Lead Free="Lead Free", Length=2mm, Material=Ceramic, Mount="Surface Mount", Packaging="Tape and Reel", REACH SVHC="No SVHC", Termination=SMD/SMT, Thickness=0.057inch, Voltage Rating=25V, Voltage Rating (DC)=25V, Weight=0.000335oz, Width=1.25mm
C8_REG_1 C8_REG_2 C9_REG_1 C9_REG_2: library part CMP-00212-84766729-1, "C0805C475J4RACAUTO Cap Ceramic 4.7uF 16V X7R 5% Pad SMD 0805 125C Automotive T/R", Capacitance=4.7µF, Case/Package=0805, Dielectric=X7R, Dielectric Material=Ceramic, Max Operating Temperature=125°C, Min Operating Temperature=-55°C, Tolerance=5%, Voltage Rating=16V, Height=1.4mm, Material=Ceramic, NexarPartId=84766729, Packaging="Cut Tape", RoHS=Compliant, Voltage Rating (DC)=16V
C10_REG_1 C10_REG_2 C11_REG_1 C11_REG_2: library part CMP-14477-002774-2, "None", Capacitance=1uF, Case Code (Imperial)=1210, Case Code (Metric)=3225, Dielectric=X5R, Max Operating Temperature=125°C, Min Operating Temperature=-55°C, Package Quantity=1, Resistor Type=Ceramic, Tolerance=10%, Voltage=100V, Case/Package=1210, Construction=Flat, Depth=2.5mm, Halogen Free="Halogen Free", Height=1.9mm, Length=3.2mm, Mount="Surface Mount", Number of Pins=2, Packaging="Tape and Reel", Radiation Hardening=No, REACH SVHC="No SVHC", RoHS Compliant=Yes, Series=M, Termination=SMD/SMT, Thickness=0.083inch, Voltage Rating=100V, Voltage Rating (DC)=100V, Width=2.5mm
D1: library part CMP-1060-00565-1, "Zener Voltage Regulator, 500 mW, 2-Pin SOD-123, Pb-Free, Tape and Reel", Manufacturer="On Semiconductor", ComponentLink1Description="Manufacturer URL", ComponentLink1URL=http://www.onsemi.com/, ComponentLink2Description=Datasheet, ComponentLink2URL=http://www.onsemi.com/pub_link/Collateral/MMSZ5221BT1-D.PDF, ComponentLink3Description="Package Specification", ComponentLink3URL=http://www.onsemi.com/pub_link/Collateral/425-04.PDF, DatasheetVersion="Rev. 12", Mounting Technology="Surface Mount", P Max (W)=0.5, PackageDescription="2-Pin SOD, Body 1.6 x 2.69 mm", PackageReference=SOD-123-2-425-04, PackageVersion="Rev. G, 10/2009", Packing="Tape and Reel", PartNumber=MMSZ5242BT1G, RoHS=Pb-Free, VZ Typ (V)=12
D2: library part CMP-1060-00750-1, "Zener Voltage Regulator, 500 mW, 2-Pin SOD-523, Pb-Free, Tape and Reel", Manufacturer="On Semiconductor", ComponentLink1Description="Manufacturer URL", ComponentLink1URL=http://www.onsemi.com/, ComponentLink2Description=Datasheet, ComponentLink2URL=http://www.onsemi.cn/pub_link/Collateral/MM5Z2V4T1-D.PDF, ComponentLink3Description="Package Specification", ComponentLink3URL=http://www.onsemi.com/pub_link/Collateral/502-01.PDF, DatasheetVersion="Rev. 10", Mounting Technology="Surface Mount", P Max (W)=0.5, PackageDescription="2-Pin SOD, Body 1.2 x 0.8 mm", PackageReference=SOD-523-2-502-01, PackageVersion="Rev. E, 09/2010", Packing="Tape and Reel", PartNumber=MM5Z3V3T1G, RoHS=Pb-Free, VZ Typ (V)=3.3
D3 D4: library part CMP-1060-00750-1, "Zener Voltage Regulator, 500 mW, 2-Pin SOD-523, Pb-Free, Tape and Reel", Manufacturer="On Semiconductor", PartNumber=MM5Z3V3T1G, ComponentLink1Description="Manufacturer URL", ComponentLink1URL=http://www.onsemi.com/, ComponentLink2Description=Datasheet, ComponentLink2URL=http://www.onsemi.cn/pub_link/Collateral/MM5Z2V4T1-D.PDF, ComponentLink3Description="Package Specification", ComponentLink3URL=http://www.onsemi.com/pub_link/Collateral/502-01.PDF, DatasheetVersion="Rev. 10", Mounting Technology="Surface Mount", P Max (W)=0.5, PackageDescription="2-Pin SOD, Body 1.2 x 0.8 mm", PackageReference=SOD-523-2-502-01, PackageVersion="Rev. E, 09/2010", Packing="Tape and Reel", RoHS=Pb-Free, VZ Typ (V)=3.3
D5: library part CMP-004-00040-2, "Led, Red/Grn, 180Mcd/230Mcd, 624Nm/525Nm Rohs Compliant: Yes", Component Type=Standard, Design Item ID=CMP-004-00034-2, Pins=4, Source=rgled.SchLib
F1: library part CMP-07399-000013-1, "FUSE BOARD MOUNT 2A 63VDC 1206", Case Code (Imperial)=1206, Case Code (Metric)=3216, Current Rating=2A, Max Operating Temperature=105°C, Min Operating Temperature=-20°C, Voltage Rating (DC)=63V, Approvals=UL, Case/Package=1206, Fuse Type="Board Mount (Cartridge Style Excluded)", Mount="Surface Mount", Packaging="Cut Tape", RoHS Compliant=Yes, Series="SinglFuse™ SF-1206FP"
F2: library part CMP-08606-000071-1, "PTC RESET FUSE 60V 500MA 2920", Case Code (Imperial)=2920, Case Code (Metric)=7351, Current Rating=10A, Hold Current=500mA, Max Operating Temperature=85°C, Max Voltage Rating (DC)=60V, Min Operating Temperature=-40°C, Package Quantity=1500, Power Dissipation=1.5W, Resistance=1.4R, Trip Current=1A, Approvals=cULus, Case/Package=2920, Height=1.25mm, Lead Free="Lead Free", Length=7.98mm, Max Current Rating=10A, Operating Supply Voltage=60V, Packaging="Tape and Reel", REACH SVHC="No SVHC", RoHS Compliant=Yes, Series=2920L, Terminal Material=Copper, Termination=SMD/SMT, Time to Trip=4s, Voltage Rating=60V, Voltage Rating (DC)=60V, Width=5.44mm, Working Voltage=60V
J1 J3 J4 J5 J7 J10 J11: library part CMP-2000-05181-2, "PC TEST POINT MINIATURE BLACK", Color=Black, Flammability Rating="UL94 V-0", Package Quantity=100, Body Material=Bronze, Contact Material=Bronze, Contact Plating=Silver, Diameter=2.54mm, Height=0.3inch, Hole Diameter=1.6mm, Housing Color=Black, Inside Diameter=1.27mm, Insulation=Insulated, Insulation Material=Nylon, Lead Free="Lead Free", Length=7.62mm, Material=Nylon, Mount="Through Hole", Number of Contacts=1, Number of Ports=1, Orientation=Straight, Outside Diameter=2.54mm, Packaging=Bulk, Plating=Silver, REACH SVHC="No SVHC", RoHS Compliant=Yes, Series=THM, Termination="Through Hole"
J2: library part CMP-002-00067-1, "Barrier Strip Terminal Block", RoHS Compliant=Yes
J6: library part CMP-12637-106234071-1, "PJ-102A 2.0 x 6.5 mm, 2.5 A, Horizontal, Through Hole, Tapered Pins, Dc Power Jack Connector", Color=Black, Current Rating=2.5A, Flammability Rating="UL94 V-0", Insulation Resistance=50MΩ, Max Operating Temperature=85°C, Min Operating Temperature=-25°C, Voltage Rating=24V, Contact Gender=Male, Contact Material="Copper, Nickel, Tin", Contact Plating=Nickel, Diameter=2.1mm, Gender=Male, Height=11.2mm, Housing Color=Black, Housing Material=Thermoplastic, Inside Diameter=2mm, Lead Free="Lead Free", Lifecycle Status=Production, Mount="Through Hole", NexarPartId=106234071, Number of Conductors=2, Number of Contacts=3, Orientation=Horizontal, Outside Diameter=6.5mm, Packaging=Bulk, RoHS=Compliant, Schedule B="8536695050, 8536695050", Shielding=No, Termination="Through Hole", Voltage Rating (DC)=24V
J8: library part CMP-03368-000001-1, "CONN FPC VERT 15POS 1.00MM SMD", Current Rating=1A, Manufacturer=TE, Package=0, Temperature="-20°C to +85°C", Temperature Range High=+85°C, Temperature Range Low=-20°C, Voltage Rating=125V, Automotive=No, Category=Conn, ComponentLink2Description=Datasheet, ComponentLink2URL=https://www.te.com/commerce/DocumentDelivery/DDEController?Action=showdoc&DocId=Customer+Drawing%7F1734248%7FE1%7Fpdf%7FEnglish%7FENG_CD_1734248_E1__.pdf%7F1-1734248-5, Conn Gender=Female, Conn Orientation=Vertical, Contact Material=Gold,Nickel, Device Class L1=Connectors, Device Class L2="FFC / FPC", Device Class L3=unset, Digikey Description="CONN FPC VERT 15POS 1.00MM SMD", Height=8mm, Is Female=yes, Lead Free=Yes, Manufacturer Part Number=1-1734248-5, Mounting Type="Surface Mount", Mouser Description="FFC & FPC Connectors 15P 1.0 FPC, Zip V/T SMT", Number of Contacts=15, Octopart=https://octopart.com/1-1734248-5-te+connectivity-40620898, Pitch=1mm, RoHS=TRUE
J9: library part CMP-002-00054-2, "RF F Connector, Male, Board Mount, Solder Terminal, Plug", Connector Type="RF F CONNECTOR", Mounting Technology=Board, RoHS Compliant=Yes
L1: library part CMP-06042-002684-1, "Shielded Wirewound Inductor 3.9uH 30% 4200mA 0.0264Ω SMD", Case/Package=Nonstandard, Current Rating=4.2A, DC Resistance (DCR)=26.4mR, Inductance=3.9uH, Max Operating Temperature=85°C, Min Operating Temperature=-40°C, Resistor Type=Wirewound, Saturation Current=4.7A, Test Frequency=100kHz, Tolerance=30%, Core Material=Ferrite, Height - Seated (Max)=0.177inch, Length=0.248inch, Mount="Surface Mount", Packaging="Tape and Reel", Shielding=Shielded, Width=0.248inch
L2: library part CMP-11268-000041-1, "NOT COILCRAFT - ACTUAL P# --> ADL32VHC-220M /  - Power Injection Chokes for PoC", Ambient Temperature Range High=+125°C, Ambient Temperature Range Low=-40°C, Inductance=22uH, Manufacturer=coilcraft, Manufacturer Part Number=1210POC-223MRC, Package=1210POC, Rms Current=700mA, Saturation Current=720mA, Self Resonant Frequency=70MHz, Series Resistance=0.88Ω, Test Frequency=100kHz, Tolerance=20%, Automotive=Yes, Automotive Grade="Grade 1", Category=Ind, ComponentLink2Description=Datasheet, ComponentLink2URL=https://drive.google.com/open?id=15FlOq8Y4YbRFohfA_cJ40jgnqs8va2Mh, Core Material=Ferrite, Device Class L1="Passive Components", Device Class L2=Inductors, Device Class L3="Fixed Inductors", Height=3mm, Lead Free=Yes, Octopart=https://octopart.com/1210poc-223mrc-coilcraft-103207315, RoHS=TRUE
L3: library part CMP-11268-000007-1, "Fixed Inductors PFL1609 Low Profile 0.56 uH 20 % 1.4 A", Ambient Temperature Range High=+105°C, Ambient Temperature Range Low=-40°C, Inductance=0.56uH, Manufacturer=coilcraft, Package=PFL1609, Rms Current=1100mA, Saturation Current=710mA, Self Resonant Frequency=600MHz, Series Resistance=130mΩ, Test Frequency=7.9MHz, Tolerance=20%, Automotive=Yes, Automotive Grade="Grade 1", Category=Ind, ComponentLink2Description=Datasheet, ComponentLink2URL=https://www.coilcraft.com/pdfs/pfl1609.pdf, Composition=Wirewound, Core Material=Composite, Device Class L1="Passive Components", Device Class L2=Inductors, Device Class L3="Fixed Inductors", Height=0.95mm, Lead Free=Yes, Manufacturer Part Number=PFL1609-561MEW, Mouser Description="Fixed Inductors PFL1609 Low Profile 0.56 uH 20 % 1.4 A", Octopart=https://octopart.com/pfl1609-561mew-coilcraft-20329171, RoHS=TRUE, Shielding=true
L4: library part CMP-2000-07143-1, "Semi-Shielded Power Inductor, 100 uH, -40 to 125 degC, 2-Pin SMD, RoHS, Tape and Reel", Current, Rating="1 /  / A", Inductance="100 /  / µH", Manufacturer=Bourns, Package Description="2-Pin Surface Mount Device, Body 8 x 8 mm", Tolerance="±20 /  / %", Brand/Series=SRN8040Series, Datasheet URL=http://www.produktinfo.conrad.com/datenblaetter/1000000-1099999/001056456-da-01-en-MAG_ABG_LEIST_IND_SRN8040_101M_100UH_SMD.pdf, Datasheet Version=08/2013, Manufacturer URL=http://www.bourns.com/, Mounting Technology=SurfaceMount, Package Reference=SRN8040-101M, Termination=SMT, Type=Power
MH1 MH2 MH3 MH4 MH5: library part CMP-00028-00001-13, "Plated mounting hole with 6 peripheral vias. This is a generic symbol that groups all relevant footprints."
P1 P2 P3 P4: library part CMP-2000-07492-1, "Male Header, Pitch 2.54 mm, 1 x 2 Position, Height 8.21 mm, Tail Length 3.05 mm, -65 to 105 degC, RoHS, Bulk", Case\/Package=100, Colour=Black, Current Rating=3A, Flammability Rating=UL94V-0, High Temperature Housing=Yes, Manufacturer="TE Connectivity", Max Current Rating=5A, Max Operating Temperature=105degC, Min Operating Temperature=-65degC, Package Description="Male Header, Pitch 2.54 mm, 1 x 2 Position, Height 8.21 mm, Tail Length 3.05 mm", Package Quantity=500, Approvals=CSA, Board Standoff=No(Without), Connector Type=Header, Contact Gender=Male, Contact Material=CopperAlloy, Contact Mating Length=0.23inch, Contact Plating=Matte, Contact Protection=No(Without), Contact Shape=Square, Datasheet URL=http://www.te.com/commerce/DocumentDelivery/DDEController?Action=showdoc&DocId=Customer+Drawing%7F146280%7FH1%7Fpdf%7FEnglish%7FENG_CD_146280_H1.pdf%7F5-146280-2, Datasheet Version="Rev. H1, 08/2016", Depth=2.34mm, Gasket=No(Without), High Speed Serial Data Connector=No, Housing Colour=Black, Housing Material=Polymer, Keyed=No, Length=4.67mm, Manufacturer URL=http://www.te.com/, Mating Alignment=No(Without), Mating Connector Lock=No(Without), Mating Post Length=0.23inch, Mount=ThroughHole, Mounting Technology=ThroughHole, Number of Contacts=2, Number of Positions=2, Number of Rows=1, Orientation=Straight, Package Reference=5-146280-2, Packaging=Carton, Panel Mount Retention=No(Without), PCB Mount Retention=Without, PCB Mounting Orientation=Vertical, PCB Thickness=0.063inch, Pitch=2.54mm, Radiation Hardening=No, RoHSCompliant=true, Row Spacing=2.54mm, Selectively Loaded=No(Without), Stabilizers=No(Without), Termination=ThroughHole, Termination Post Length=0.12inch
P5: library part CMP-1502-01074-4, "THT Vertical Pin Header WR-PHD, Pitch 2.54 mm, Single Row, 7 pins", Color=Black, Contact Resistance=20mΩ, Current Rating=3A, Operating Supply Voltage=250V, Connector Type="Male Pin", Contact Material=Copper, Contact Mating Length=5.9944mm, Contact Plating=Gold, Gender=Male, Lead Pitch=2.54mm, Mount="Through Hole", Number of Contacts=7, Number of Pins=7, Number of Positions=7, Number of Rows=1, Orientation=Vertical, Packaging=Bulk, Pitch=2.54mm, RoHS=Compliant, Termination=Solder
Q1: library part CMP-013-00018-2, "Trans MOSFET P-CH 20V 22.1A 8-Pin PowerPAK 1212 EP T/R", Component Type=Standard, Design Item ID=CMP-013-00036-4, Pins=5, Source=SISH615ADN-T1-GE3.SchLib
Q2: library part CMP-2000-04939-1, "Dual N & P-Channel 2.5 V Specified PowerTrench(TM) MOSFET, -55 to 150 degC, 6-Pin SOT-23, RoHS, Tape and Reel", Manufacturer=Fairchild, Maximum Continuous Drain Current=2.7@NChannel, Maximum Drain Source Voltage=20V, Maximum Gate Source Voltage=±8V, Operating Temperature=-55to150degC, Package=6SuperSOT, Package Description="6-Pin Small Outline Transistor, Body 2.9 x 1.6 mm, Pitch 0.95 mm", Package Reference=SOT23-6, Package Version="Rev. 5, 05/2015", Category=MOSFET, Channel Mode=Enhancement, Channel Type=N, Datasheet URL=https://www.fairchildsemi.com/datasheets/FD/FDC6327C.pdf, Datasheet Version="Rev. E, 07/2000", Manufacturer URL=https://www.fairchildsemi.com/, Mounting=SurfaceMount, Package URL=https://www.fairchildsemi.com/package-drawings/MA/MA06A.pdf, Packaging=Tape&Reel, Rad Hard=No, RDS-on=80@4.5V@NChannel, Typical Fall Time=3@NChannel, Typical Rise Time=9@NChannel, Typical Turn-Off Delay Time=12@NChannel, Typical Turn-On Delay Time=5@NChannel
R1 R2 R3 R4 R5 R6 R7 R8 R9 R10 R11 R12 R13 R14 R15 R16 R17_REG_1 R17_REG_2 R18_REG_1 R18_REG_2 R19_REG_1 R19_REG_2 R20 R21 R22 R23 R24 R25 R26 R27: library part CMP-009-00002-14, "Resistor"
TP1: library part CMP-00025-3, "Test Point .6mm"
U1: library part CMP-12757-000006-1, "IC REG BUCK 3.3V 2A TSOT26", Ambient Temperature Range High=+85°C, Ambient Temperature Range Low=-40°C, Manufacturer="Diodes Inc.", Max Junction Temp=+160°C, Max Supply Voltage=32V, Min Supply Voltage=3.8V, Nominal Supply Current=22uA, Output Current=2A, Output Voltage=3.3V, Package=TSOT26, Switching Frequency=1.1MHz, Temperature="to +160°C", Automotive=No, Category=IC, ComponentLink2Description=Datasheet, ComponentLink2URL=https://www.diodes.com/assets/Datasheets/AP63200-AP63201-AP63203-AP63205.pdf, Device Class L1="Integrated Circuits (ICs)", Device Class L2="Power Management ICs", Device Class L3="Voltage Regulators - Switching", Digikey Description="IC REG BUCK 3.3V 2A TSOT26", Footprint Url=https://www.diodes.com/assets/Package-Files/TSOT26.pdf, Height=1mm, Lead Free=Yes, Manufacturer Part Number=AP63203WU-7, Mouser Description="AP63203 Series 3.3 V 2 A SMT Fixed Low IQ Synchronous Buck - TSOT-26", Number Of Outputs=1, Octopart=https://octopart.com/ap63203wu-7-diodes+inc.-98099550, Output Type=Fixed, RoHS=TRUE, Standoff Height=0.01mm, Switching Topology=Buck, Temperature Range High=+160°C
U2_REG_1 U2_REG_2: library part CMP-0136-00358-1, "1A, Low Voltage, Low Quiescent Current LDO Regulator, 8-Pin DFN, Extended Temperature, Tape and Reel", DatasheetVersion="revC, Aug-2007", PackageDescription="8-Lead Plastic Dual Flat, No Lead Package (MF) - 3x3x0.9mm Body [DFN]", PackageReference=DFN-MF8, PackageVersion="revBB, Aug-2009"
U3: library part CMP-015-00012-2, "3Gbps Serializer TQFN-32 Serializers / Deserializers ROHS"
Y1: library part CMP-2000-05733-3, "Crystal 25MHz ±20ppm (Tol) ±30ppm (Stability) 18pF FUND 60Ω 4-Pin SMD T/R", Case/Package=CSMD, ESR (Equivalent Series Resistance)=60R, Frequency=25MHz, Frequency Stability=30ppm, Frequency Tolerance=20ppm, Load Capacitance=18pF, Max Operating Temperature=85°C, Min Operating Temperature=-40°C, Operating Frequency="25 MHz", Package Quantity=1000, Depth=2.5mm, Height=0.039inch, Lead Free="Lead Free", Length=3.2mm, Mount="Surface Mount", Number of Pins=4, Packaging="Tape and Reel", Radiation Hardening=No, Series=ABM8G, Series Resistance=60R, Termination=SMD/SMT, Tolerance=20ppm, Width=0.098inch

## Via types
v1: diameter 0.5, hole 0.3, Top Layer to Bottom Layer, tented both sides, 112 vias
v2: diameter 0.66, hole 0.33, Top Layer to Bottom Layer, tented both sides, 4 vias

## Nets (pads, with @x,y where several pads share a name; then routed paths per layer and width w, separated by ;. In a path a pad name is that pad's centre, name@x,y a point inside that pad or via, vN(x,y) a via of type N, cw(c..) or ccw(c..) an arc to the next point about the centre after c; other vN are vias at no path point)
1V2: C10_REG_2.1 C11_REG_2.1 C22.1 C23.1 C29.1 J5.1 R17_REG_2.2 U2_REG_2.8 U3.15 | length 4.4
  Top Layer w0.2: C11_REG_2.1 35.825,15.15 R17_REG_2.2
  Bottom Layer w0.25: U3.15 46.25,28.5 v1(46.75,29)
  other v1: 33,15 34,15 35,15
1V8: C10_REG_1.1 C11_REG_1.1 C20.1 C21.1 C28.1 J4.1 R4.2 R17_REG_1.2 U2_REG_1.8 U3.11 | length 38.7
  Top Layer w0.2: C11_REG_1.1 35.825,21.65 R17_REG_1.2
  Mid Layer 1 w0.2: v1(34,21.5) 32.25,19.75 32.25,13.75 32.75,13.25 45.25,13.25 46.5,14.5 50.75,14.5 51.25,15 51.25,18.733 51.5,18.983 v1(51.5,19)
  Bottom Layer w0.2: v1(51.5,19) R4.2
  Bottom Layer w0.25: v1(44,29) 44,28.932 44.25,28.682 U3.11
  other v1: 33,21.5 35,21.5
3V3: C1.1 C2.1 C6.1 C7.1 C8_REG_1.1 C8_REG_2.1 C9_REG_1.1 C9_REG_2.1 C18.1 C19.1 C27.1 D5.2 J3.1 J8.15 L1.2 Q2.2 R3.2 R5.2 R9.2 R10.2 R16.1 R18_REG_1.1 R18_REG_2.1 R23.2 R25.2 R26.2 U1.1 U2_REG_1.1 U2_REG_1.2 U2_REG_2.1 U2_REG_2.2 U3.16 | length 46.5
  Top Layer w0.2: R18_REG_2.1 22.4,15.15 v1(22.5,15.25) ; R18_REG_1.1 22.4,21.65 v1(22.5,21.75) ; U1.1 26.9,30.358 28.991,32.448 34.452,32.448 36.35,30.55 L1.2 ; D5.2 52.85,39.45 53.827,40.427 56.275,40.427 56.452,40.25 56.452,39.25 56.202,39 v1(55.219,39)
  Top Layer w0.3: R5.2 52.436,11.914 C2.1@52.436,10.586 ; R5.2@52.35,12.075 53.4,13.125 53.4,13.25 R10.2 R9.2
  Top Layer w0.5: J8.15@52,3 52,6.75 52,8.5 52.5,9 C1.1 C2.1 ; v1(52,10.5) 52.414,10.5 52.436,10.522 C2.1@52.436,10.586
  Bottom Layer w0.2: R26.2@35.75,25 35.85,24.9 R25.2 ; C27.1 50,27.707 50.236,27.471 50.304,27.471 51.425,26.35 R3.2 ; v1(55.219,39) Q2.2 56.275,39 56.925,39.65 R16.1
  other v1: 23.5,15.25 24.5,15.25 23.5,21.75 24.5,21.75 35.5,25 38.25,27.5 39,27.5 39.75,27.5 50,29
3V3_FPC_I2C_SCL: J8.13 P2.1 | length 8.8
  Top Layer w0.2: P2.1 50,8.23 50,6.75 J8.13@50,3
3V3_FPC_I2C_SDA: J8.14 P1.1 | length 8.1
  Top Layer w0.2: P1.1 51,9.73 J8.14@51,6.75
  Top Layer w0.3: J8.14@51,3 J8.14@51,6.75
3V3_FPC_IO0: J8.11 P3.1 R5.1 | length 16.3
  Top Layer w0.2: J8.11@48,3 v1(48,6.75) ; R5.1 54.73,12 P3.1
  Bottom Layer w0.2: v1(48,6.75) 52.02,6.75 P3.1
3V3_FPC_IO1: J8.12 TP1.1 | length 15.4
  Top Layer w0.2: J8.12@49,6.75 49,3 49,2.375 49.502,1.873 55.373,1.873 TP1.1
3V3_LOCK: P5.6 R11.2 U3.31 | length 41.6
  Top Layer w0.2: v1(43.5,21.5) 43.8,21.2 54.72,21.2 P5.6
  Bottom Layer w0.2: v1(43.5,21.5) 43.5,21.581 43.75,21.831 U3.31 ; R11.2 49.425,39.65 48.75,38.975 48.75,37.25 51.5,34.5 56.5,34.5 57.5,33.5 57.5,21.42 P5.6
3V3_MFP0: P3.2 P5.1 U3.2 | length 38.6
  Top Layer w0.2: v1(41.5,23.5) 42.25,22.75 54,22.75 55.5,21.25 56.75,21.25 ; P3.2 57.5,14.77 57.5,20.5 56.75,21.25 ; P5.1 57.5,31.12 57.5,22 56.75,21.25
  Bottom Layer w0.2: v1(41.5,23.5) 41.581,23.5 41.831,23.75 U3.2
3V3_MFP3: D2.1 P5.2 R2.1 R6.2 U3.17 | length 61.3
  Top Layer w0.2: D2.1 23.16,42.51 R2.1 ; R6.2 R2.1 ; v1(48.5,25) 54.25,25 55.5,26.25 56.5,26.25 57.198,26.948 57.198,28.882 P5.2 53.33,32.75 26.25,32.75 24,35 24,41.65 R2.1
  Bottom Layer w0.2: U3.17 48.25,26.75 49,26 49,25.5 v1(48.5,25)
3V3_MFP4: P5.3 U3.18 | length 9.5
  Top Layer w0.2: v1(48.5,25.75) 54.21,25.75 P5.3
  Bottom Layer w0.2: U3.18 48,26.25 v1(48.5,25.75)
3V3_MFP5: D3.1 P5.4 R3.1 R7.2 U3.21 | length 16.9
  Top Layer w0.2: v1(48.5,24.25) 55.08,24.25 55.83,25 P5.4
  Bottom Layer w0.2: U3.21 48,24.75 v1(48.5,24.25) ; R3.1 R7.2 51.51,28.84 D3.1 53,28 P5.4
3V3_MFP6: D4.1 P5.5 R4.1 R8.2 U3.22 | length 15.4
  Top Layer w0.2: v1(48.5,23.5) 54.96,23.5 P5.5
  Bottom Layer w0.2: U3.22 47.41,24.24 47.76,24.24 48.081,23.919 v1(48.5,23.5) ; R4.1 R8.2 51.51,23.34 D4.1 55.12,23.34 P5.5
3V3_nERRB: P5.7 R15.1 U3.32 | length 38.3
  Top Layer w0.2: v1(42.75,21.5) 43.352,20.898 52.482,20.898 P5.7
  Bottom Layer w0.2: v1(42.75,21.5) 43.25,22 U3.32 ; P5.7 58.25,19.63 58.25,38.1 R15.1
3V3_nPWDN: P4.1 R25.1 U3.1 | length 38.7
  Mid Layer 2 w0.2: P4.1 25.73,33.52 36.482,22.768 v1(41.518,22.768)
  Bottom Layer w0.2: R25.1@37.15,22.075 37.843,22.768 v1(41.518,22.768) 41.99,23.24 42.59,23.24 U3.1
3V3_SER_I2C_SCL: J11.1 P2.2 R10.1 U3.6 | length 77.2
  Top Layer w0.2: v1(41.5,26.25) 40.75,26.25 40,25.5 40,23.1 42.805,20.295 48.978,20.295 49.698,19.575 49.698,15.468 P2.2 48.77,12 50.925,12 52.35,13.425 R10.1
  Bottom Layer w0.2: J11.1 4,16.6 3,17.6 3,18.4 3.61,19.01 16.321,19.01 23.811,26.5 41.169,26.5 41.419,26.25 v1(41.5,26.25) 42,25.75 U3.6
3V3_SER_I2C_SDA: J10.1 P1.2 R9.1 U3.5 | length 65.2
  Top Layer w0.2: v1(41.5,25.5) 41,25 41,22.527 42.2,21.327 42.93,20.597 49.103,20.597 50,19.7 P1.2 51.73,15 R9.1
  Bottom Layer w0.2: v1(41.5,25.5) 41.581,25.5 41.831,25.25 U3.5
  Bottom Layer w0.217: J10.1 4.7,18.7 16.45,18.7 23.94,26.19 40.81,26.19 v1(41.5,25.5)
CSI_CK_N: J8.8 U3.28 | length 23.9
  Top Layer w0.217: J8.8@45,3 45,3.625 45.291,3.916 45.291,5.934 45,6.225 45,6.75 45,7.275 45.291,7.566 45.291,8.507 45.125,8.674 v1(45.125,8.75)
  Bottom Layer w0.217: v1(45.125,8.75) 45.125,8.826 45.291,8.993 45.291,14 45.291,15.385 cw(c45.926,15.385) 45.926,16.02 47.463,16.02 47.463,16.745 45.926,16.745 cw(c45.926,17.38) 45.291,17.38 45.291,17.697 45.291,22.25 45.25,22.291 U3.28
CSI_CK_P: J8.9 U3.27 | length 23.9
  Top Layer w0.217: v1(45.875,8.75) 45.875,8.674 45.709,8.507 45.709,7.566 46,7.275 46,6.75 46,6.225 45.709,5.934 45.709,3.916 46,3.625 J8.9@46,3
  Bottom Layer w0.217: U3.27 45.75,22.291 45.709,22.25 45.709,17.697 45.709,17.38 ccw(c45.926,17.38) 45.926,17.163 47.463,17.163 cw(c47.463,16.745) 47.881,16.745 47.881,16.02 cw(c47.463,16.02) 47.463,15.602 45.926,15.602 ccw(c45.926,15.385) 45.709,15.385 45.709,14 45.709,8.993 45.875,8.826 v1(45.875,8.75)
CSI_D0_N: J8.2 U3.26 | length 23.9
  Top Layer w0.217: J8.2@39,3 39,3.625 39.291,3.916 39.291,5.934 39,6.225 39,6.75 39,7.275 39.291,7.566 39.291,9.541 46.122,16.372 47.416,17.666 47.416,18.507 47.25,18.674 v1(47.25,18.75)
  Bottom Layer w0.217: U3.26 46.25,22.291 46.291,22.25 46.291,21.029 47.416,19.904 47.416,18.993 47.25,18.826 v1(47.25,18.75)
CSI_D0_P: J8.3 U3.25 | length 23.9
  Top Layer w0.217: J8.3@40,3 40,3.625 39.709,3.916 39.709,5.934 40,6.225 40,6.75 40,7.275 39.709,7.566 39.709,9.368 46.295,15.955 47.834,17.493 47.834,18.507 48,18.674 v1(48,18.75)
  Bottom Layer w0.217: U3.25 46.75,22.291 46.709,22.25 46.709,21.202 47.834,20.077 47.834,18.993 48,18.826 v1(48,18.75)
CSI_D1_N: J8.5 U3.30 | length 23.9
  Top Layer w0.217: J8.5@42,3 42,3.625 42.291,3.916 42.291,5.934 42,6.225 42,6.75 42,7.275 42.291,7.566 42.291,8.507 42.125,8.674 v1(42.125,8.75)
  Bottom Layer w0.217: v1(42.125,8.75) 42.125,8.826 42.291,8.993 42.291,12.791 42.291,16.521 42.291,17.376 ccw(c42.074,17.376) 42.074,17.593 40.957,17.593 cw(c40.957,18.011) 40.539,18.011 40.539,18.736 cw(c40.957,18.736) 40.957,19.153 42.063,19.153 ccw(c42.063,19.371) 42.217,19.217 44.257,21.257 44.291,21.291 44.291,22.25 44.25,22.291 U3.30
CSI_D1_P: J8.6 U3.29 | length 23.9
  Top Layer w0.217: v1(42.875,8.75) 42.875,8.674 42.709,8.507 42.709,7.566 43,7.275 43,6.75 43,6.225 42.709,5.934 42.709,3.916 43,3.625 J8.6@43,3
  Bottom Layer w0.217: v1(42.875,8.75) 42.875,8.826 42.709,8.993 42.709,12.964 42.709,16.521 42.709,17.376 ccw(c42.074,17.376) 42.074,18.011 40.957,18.011 40.957,18.736 42.063,18.736 ccw(c42.063,19.371) 42.512,18.922 44.705,21.114 44.709,21.118 44.709,22.25 44.75,22.291 U3.29
GND: C1.2 C2.2 C4.2 C5.2 C6.2 C7.2 C8_REG_1.2 C8_REG_2.2 C9_REG_1.2 C9_REG_2.2 C10_REG_1.2 C10_REG_2.2 C11_REG_1.2 C11_REG_2.2 C12_REG_1.2 C12_REG_2.2 C15.2 C16.2 C17.2 C18.2 C19.2 C20.2 C21.2 C22.2 C23.2 C24.2 C25.2 C26.2 C27.2 C28.2 C29.2 D2.2 D3.2 D4.2 J2.2 J6.2 J6.3 J7.1 J8.1 J8.4 J8.7 J8.10 J9.2 MH1.1 MH1.2 MH1.3 MH1.4 MH1.5 MH1.6 MH1.7 MH2.1 MH2.2 MH2.3 MH2.4 MH2.5 MH2.6 MH2.7 MH3.1 MH3.2 MH3.3 MH3.4 MH3.5 MH3.6 MH3.7 MH4.1 MH4.2 MH4.3 MH4.4 MH4.5 MH4.6 MH4.7 MH5.1 MH5.2 MH5.3 MH5.4 MH5.5 MH5.6 MH5.7 P4.2 Q2.5 R1.1 R6.1 R7.1 R8.1 R13.2 R14.1 R19_REG_1.1 R19_REG_2.1 R20.1 R22.1 R24.1 R27.1 U1.4 U2_REG_1.4 U2_REG_1.9 U2_REG_2.4 U2_REG_2.9 U3.33 Y1.2 Y1.4
  other v1: 53,3 38,5 41,5 44,5 47,5 5.5,8 35.5,8 55.5,8 41.375,8.75 43.625,8.75 44.375,8.75 46.625,8.75 44,10.5 39.25,11.25 44,12.25 22.5,13.5 24.5,13.5 56,15 44,15.75 40,16.5 34,17 49,17 30.5,18 44,18.25 46.5,18.75 48.75,18.75 39,19.5 22.5,20 24.5,20 39,22 3,23 8,23 40.5,23.5 43.9,23.9 45,23.9 46.1,23.9 32.5,24.25 40.5,25 43.9,25 45,25 46.1,25 43.9,26.1 45,26.1 46.1,26.1 41.5,27 5.5,28 21,29 24,29 41.5,30 48,31.75 50,31.75 52.25,31.75 41.75,32 3,33 8,33 20.25,34 41.5,34 47.5,35.75 5.5,38 10.5,38 34,38 41,38 51,38 18,43 28,43 38,43 53,43
  other v2: 28,13.9 28,15.1 28,20.4 28,21.6
NetC3_1: C3.1 U1.6 | length 2.8
  Top Layer w0.5: C3.1 27.543,30 27.629,29.914 27.629,29.27 28.849,28.05 28.95,27.95 U1.6
NetC3_2: C3.2 L1.1 U1.5 | length 1.8
  Top Layer w0.5: C3.2 30.25,30
NetC12_REG_1_1: C12_REG_1.1 U2_REG_1.6 | length 3.7
  Top Layer w0.2: C12_REG_1.1 28.5,18 30.077,19.577 30.077,20.298 29.7,20.675 U2_REG_1.6
NetC12_REG_2_1: C12_REG_2.1 U2_REG_2.6 | length 3.7
  Top Layer w0.2: C12_REG_2.1 28.5,11.5 30.077,13.077 30.077,13.798 29.7,14.175 U2_REG_2.6
NetC14_2: C14.2 R20.2 | length 1.4
  Bottom Layer w0.342: C14.2 R20.2
NetC15_1: C15.1 L2.1 L4.2 R21.2 | length 3.2
  Bottom Layer w0.5: L2.1 39.73,36.27 40.275,35.725 40.7,35.725 40.85,35.575 R21.2
  other v1: 37.75,38
NetC24_1: C24.1 C25.1 C26.1 U3.14 | length 1.7
  Bottom Layer w0.25: U3.14 45.75,28.682 46,28.932 v1(46,29)
NetD1_2: D1.2 Q1.4 R1.2 | length 4.5
  Top Layer w0.2: v1(16.25,25.25) 16.307,25.193 16.307,24.088 16.382,24.013 Q1.4
  Bottom Layer w0.2: D1.2 14.518,23.153 14.518,23.793 15.65,24.925 R1.2 15.9,25.25 v1(16.25,25.25)
NetD5_1: D5.1 R12.2 | length 1.7
  Top Layer w0.2: D5.1 54.45,39.45 54.6,39.6 54.6,39.633 54.717,39.75 R12.2
NetD5_3: D5.3 Q2.4 | length 1.2
  Top Layer w0.2: v1(52,37.75) 52.057,37.807 52.057,37.907 52.4,38.25 52.4,38.4 52.55,38.55 D5.3
NetD5_4: D5.4 R14.2 | length 1.7
  Top Layer w0.2: D5.4 54.45,38.55 54.6,38.4 54.6,38.367 54.717,38.25 R14.2
NetF1_1: F1.1 J2.1 J6.1
NetF1_2: F1.2 Q1.5-6-7-8
NetF2_1: F2.1 L4.1
NetL2_2: L2.2 L3.1 R21.1 | length 2.5
  Bottom Layer w0.5: R21.1 42.27,35.62 L2.2
NetQ2_1: Q2.1 R11.1 R13.1 | length 7.5
  Bottom Layer w0.2: R11.1 49.575,38.35 50.575,39.35 50.7,39.35 R13.1 51,40.25 51.5,40.75 54.35,40.75 55.15,39.95 Q2.1
NetQ2_3: Q2.3 R15.2 R16.2 | length 3.9
  Bottom Layer w0.2: Q2.3 55.55,38.3 56.95,38.3 R16.2 57.075,38.35 58.075,39.35 58.2,39.35 R15.2
NetQ2_6: Q2.6 R12.1 | length 5.9
  Top Layer w0.2: v1(52,40.25) 52.478,40.728 56.4,40.728 56.85,40.278 56.85,40.05 R12.1
NetR17_REG_1_1: R17_REG_1.1 R19_REG_1.2 U2_REG_1.7 | length 10.6
  Top Layer w0.2: U2_REG_1.7 29.7,21.325 31.025,20 37.075,20 37.925,19.15 R19_REG_1.2 R17_REG_1.1
NetR17_REG_2_1: R17_REG_2.1 R19_REG_2.2 U2_REG_2.7 | length 10.6
  Top Layer w0.2: U2_REG_2.7 29.7,14.825 31.025,13.5 37.075,13.5 37.925,12.65 R19_REG_2.2 R17_REG_2.1
NetR18_REG_1_2: R18_REG_1.2 U2_REG_1.3 | length 6.3